# EAGLE board SparkFun RTK Facet - Cellular-Panel (EAGLE 9.6.2), part 1 of 3
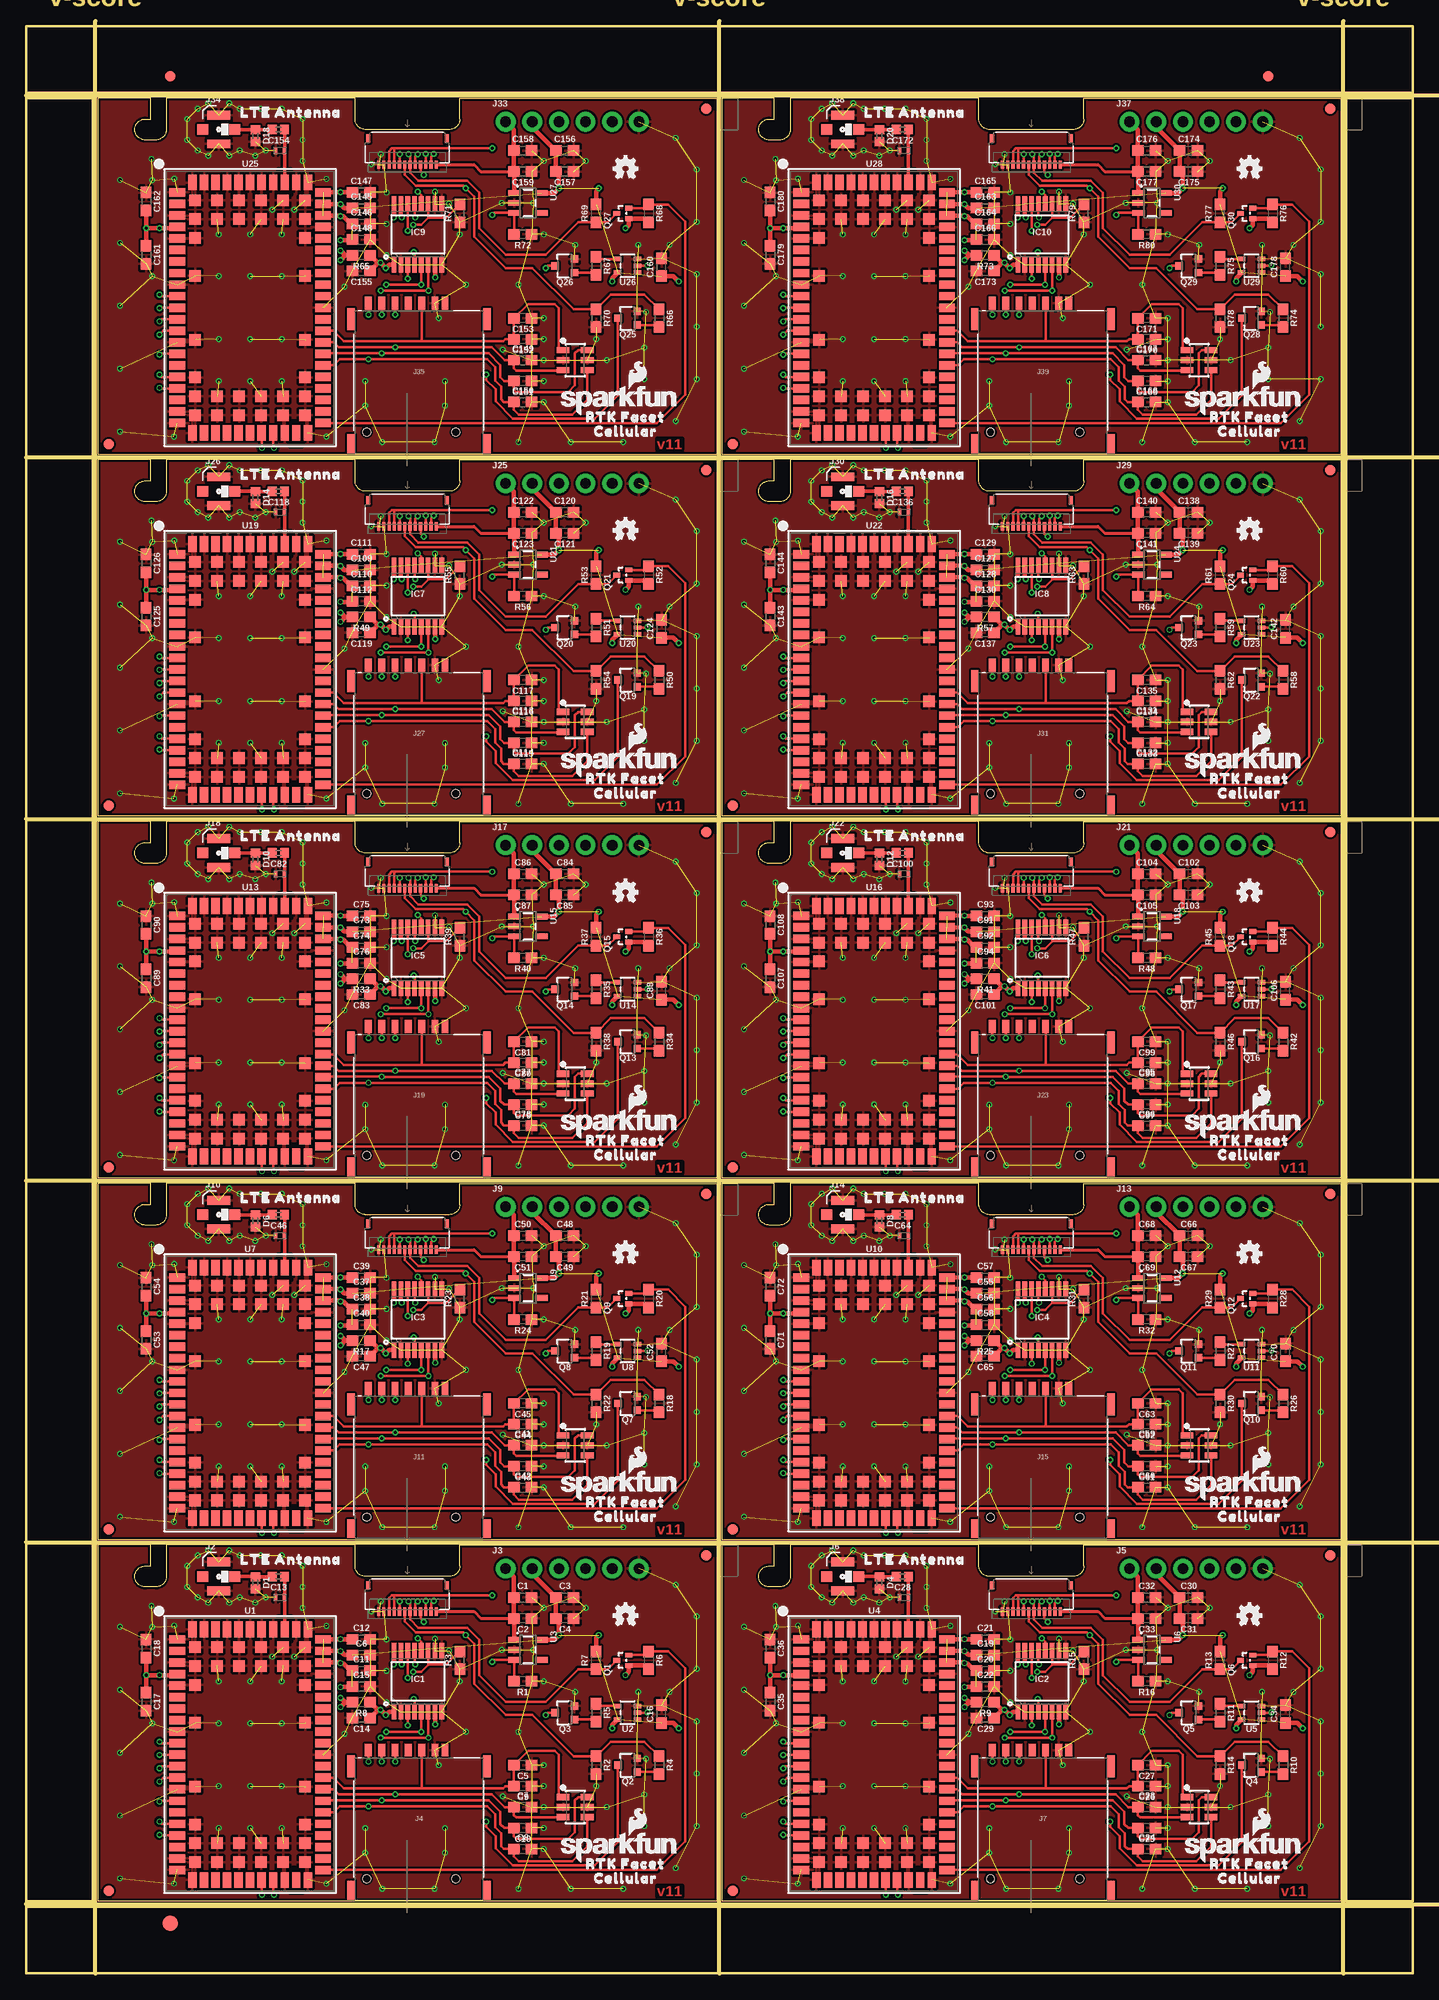
[diagram p0: board, top side]
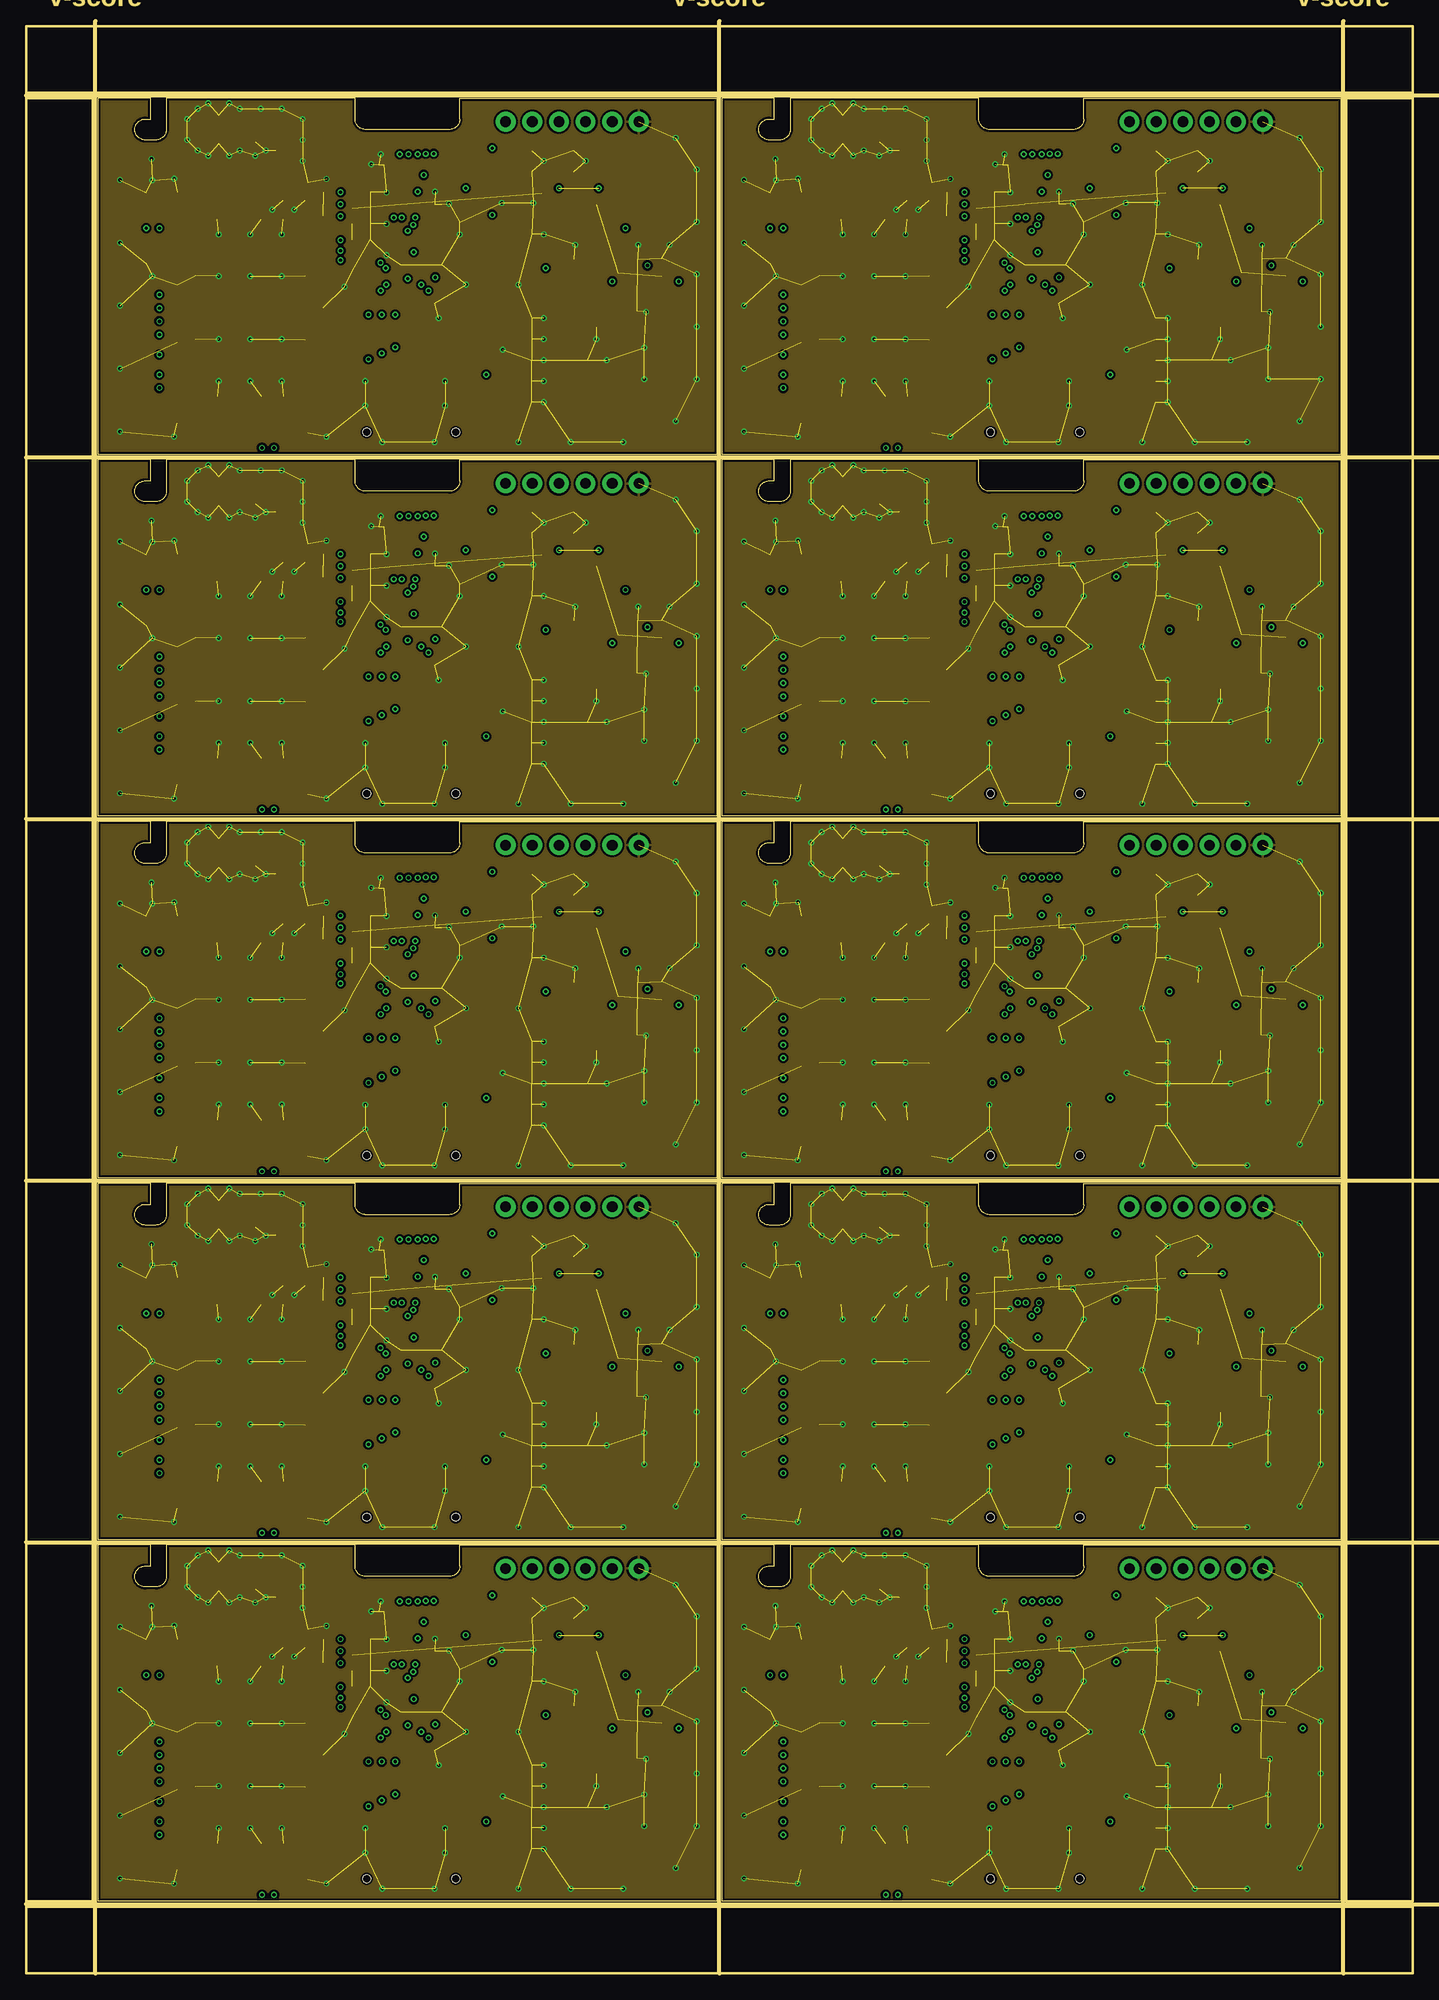
[diagram p1: board, inner layer Route2]
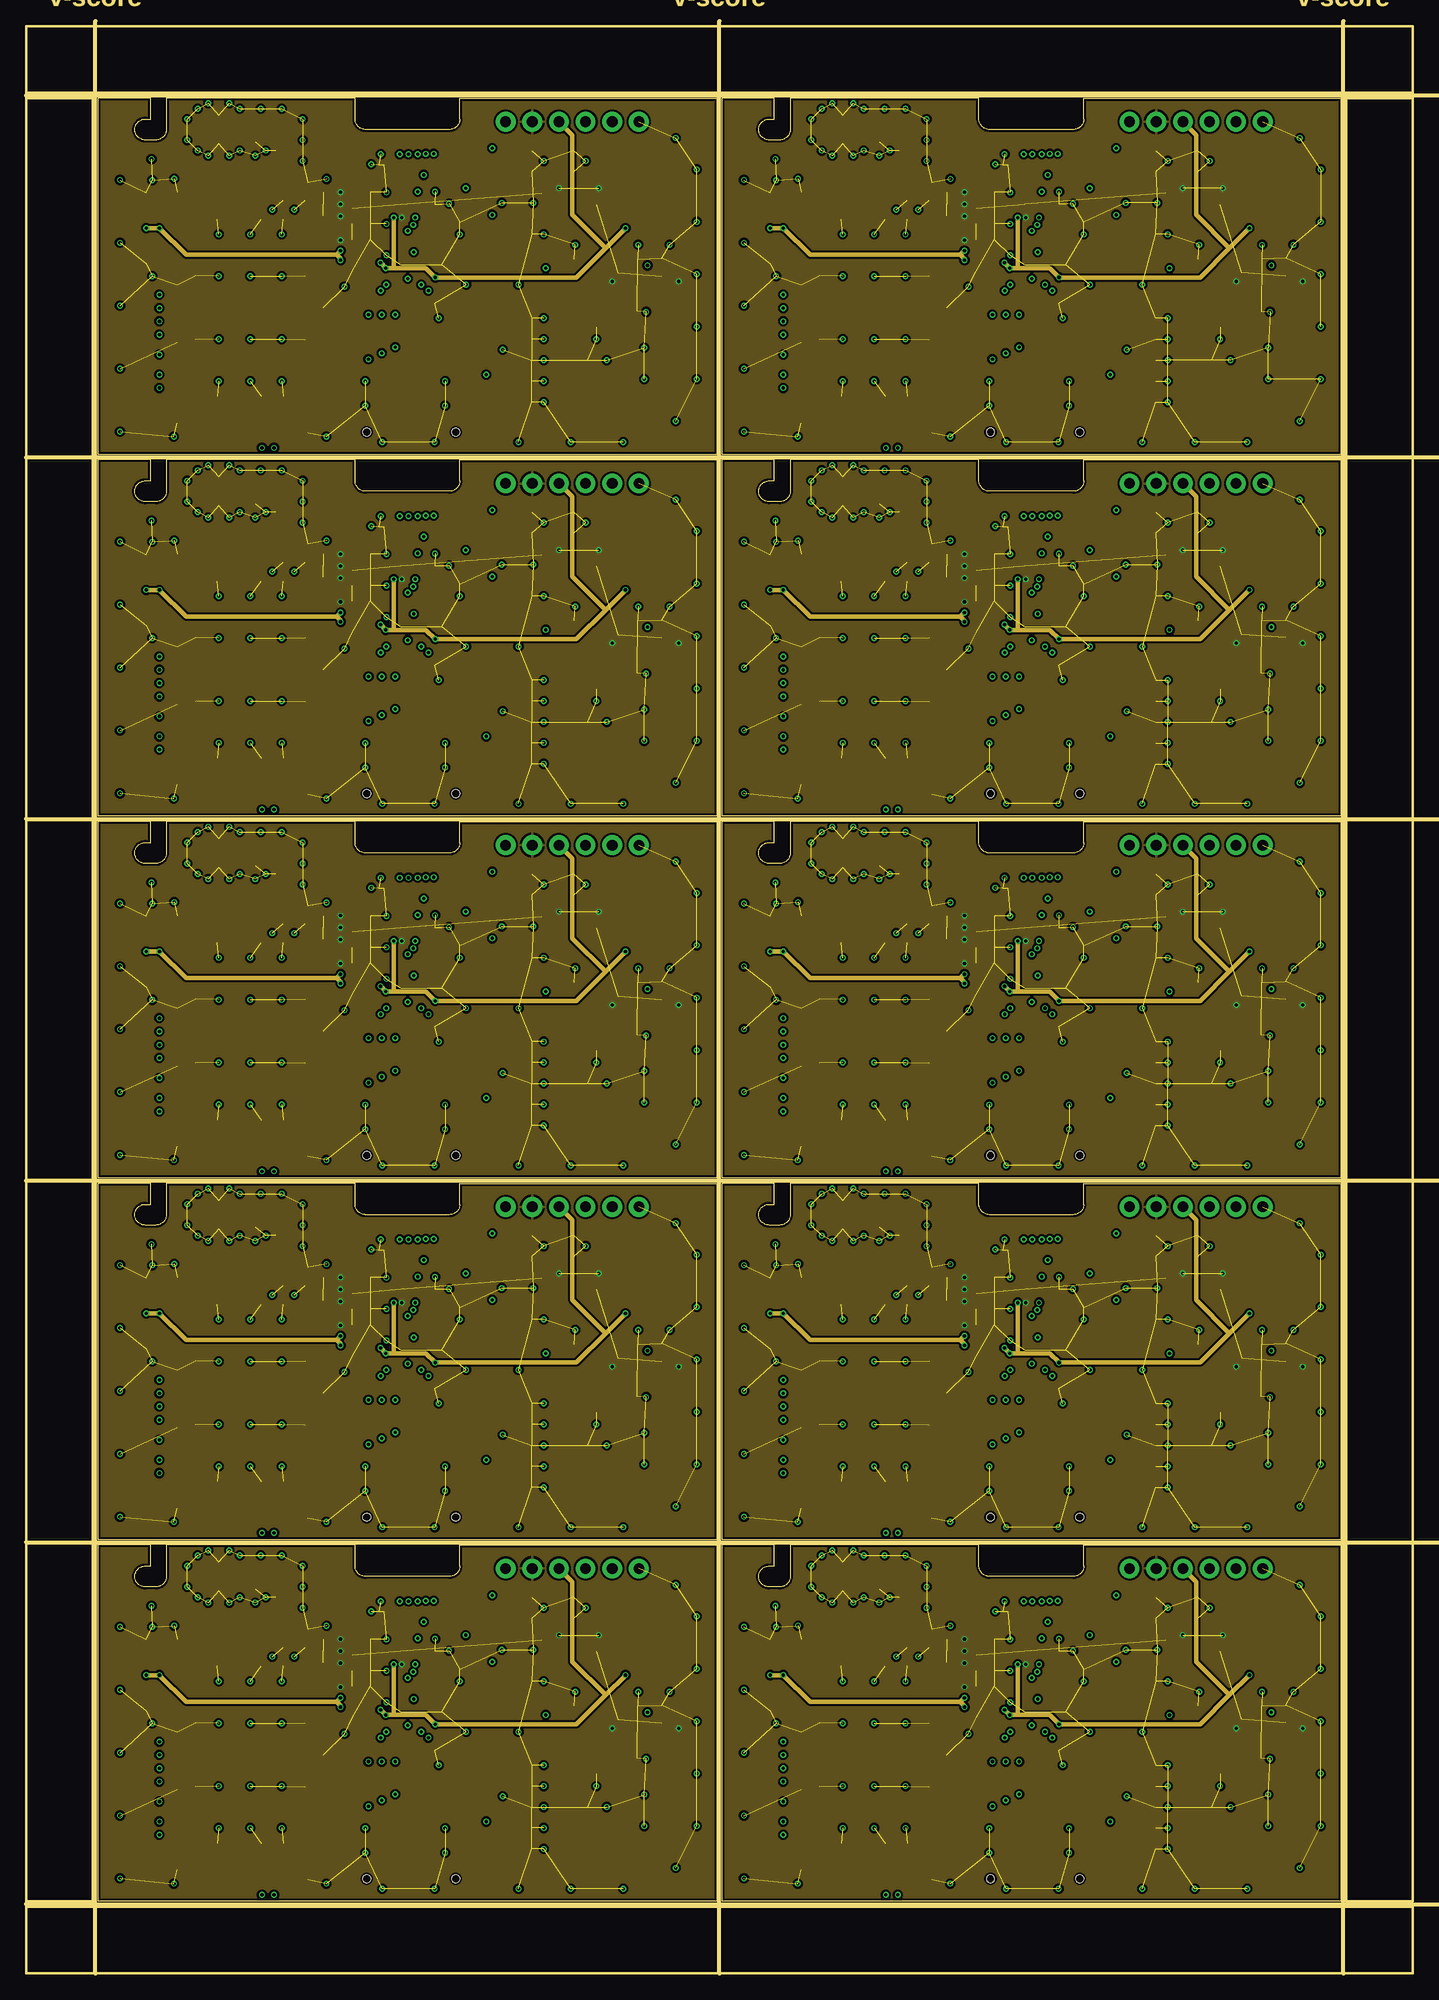
[diagram p2: board, inner layer Route15]
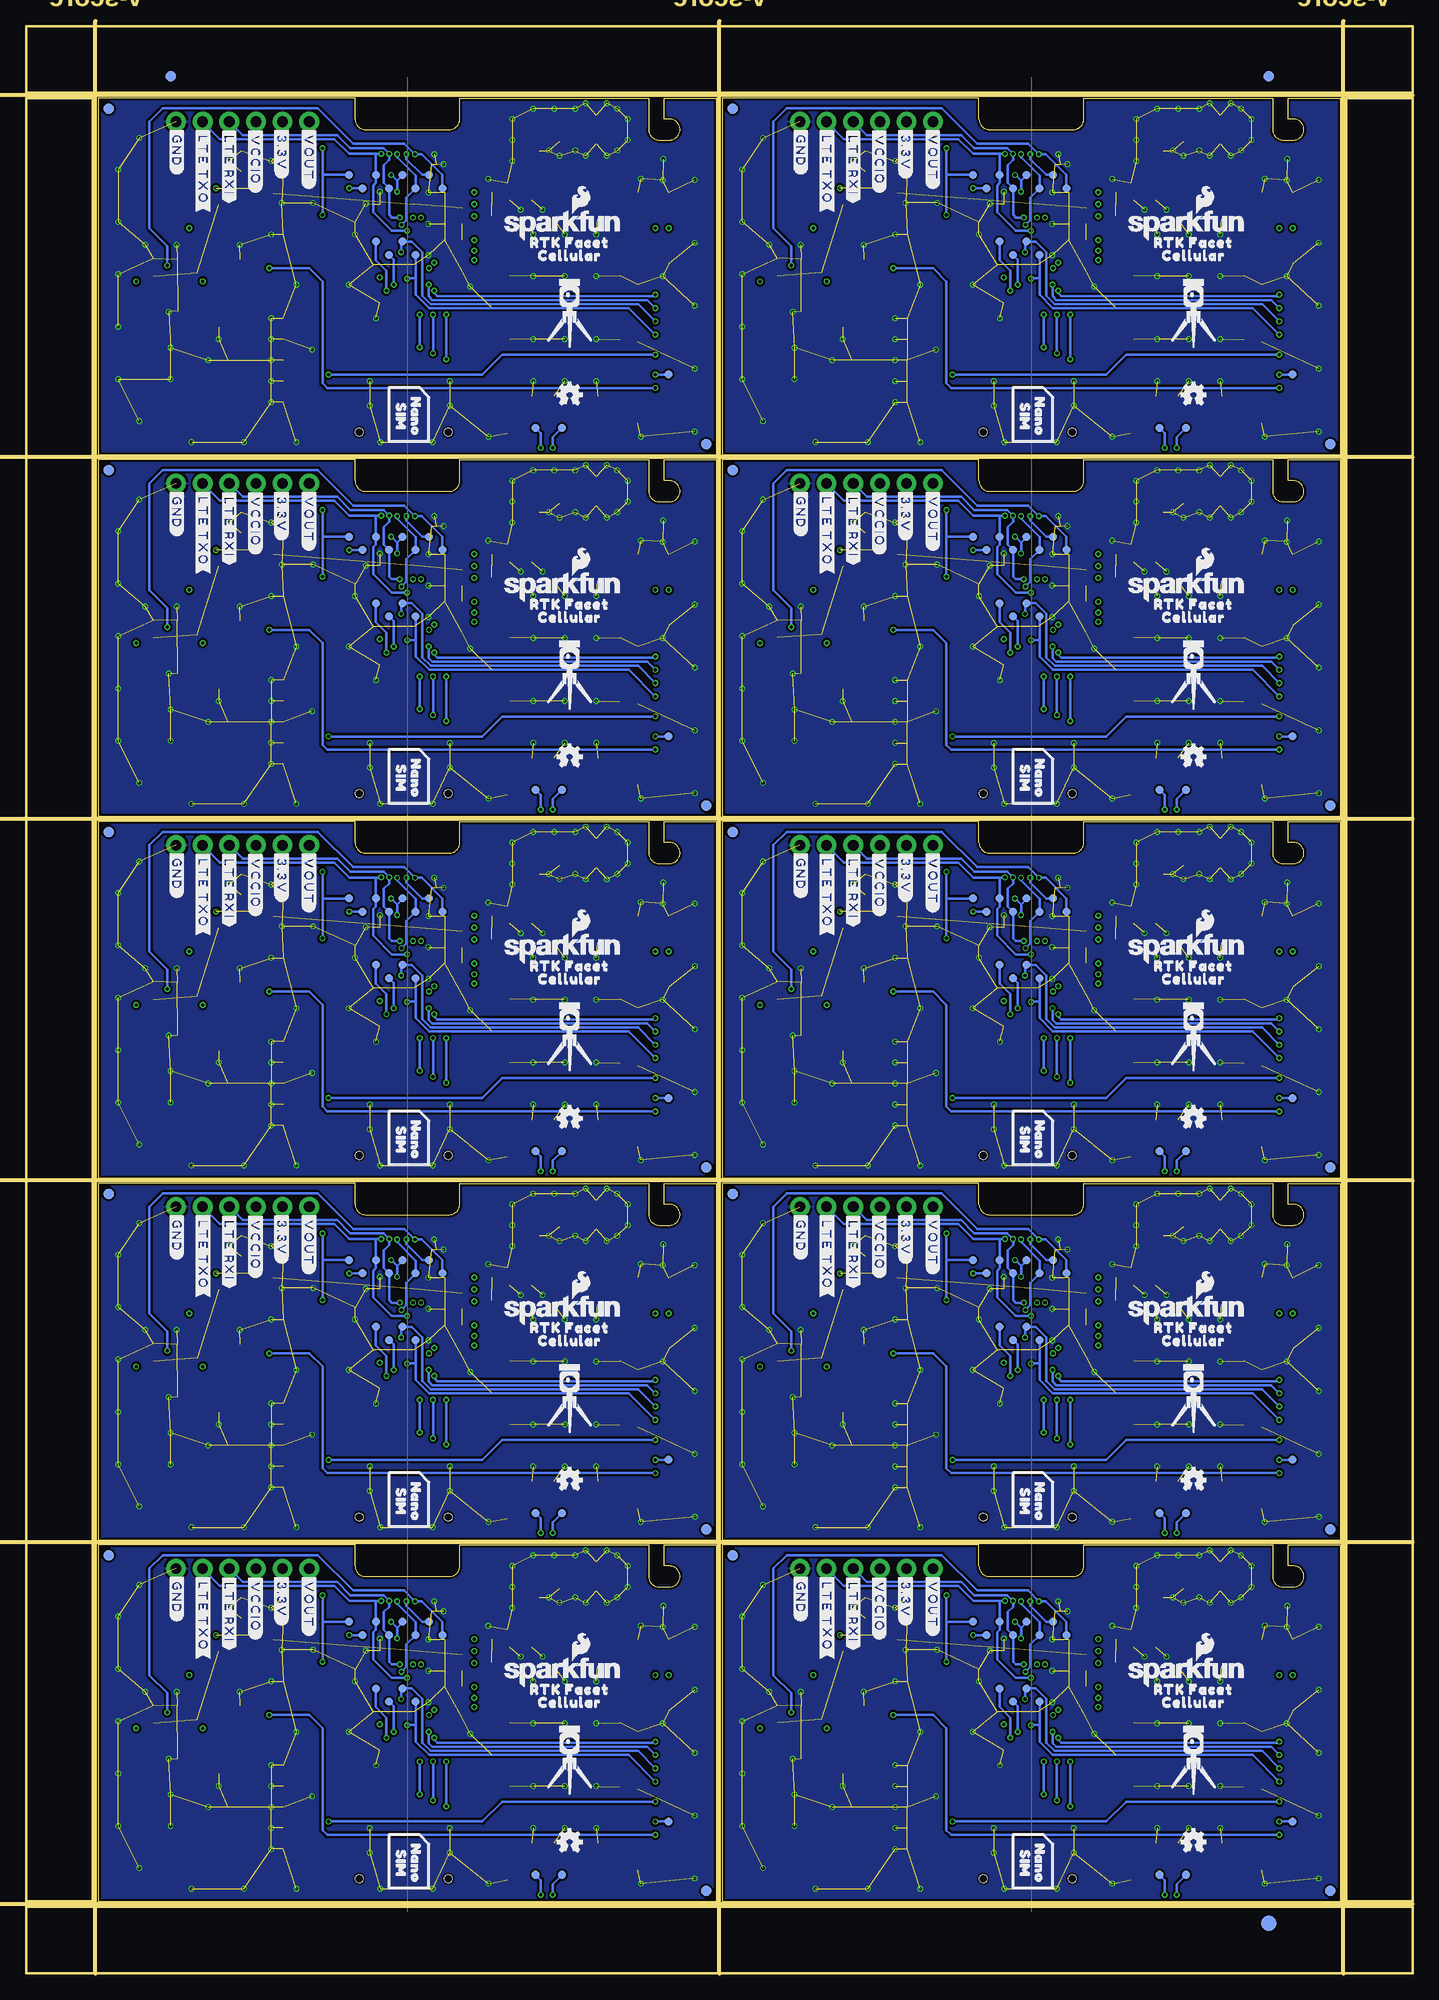
[diagram p3: board, bottom side, seen from below]

Size 132.22 x 185.75 mm. Coordinates in mm from the lower left corner, seen from the top.
Outline: 196 segments
Copper layers (1*2*15*16): Top 0.035559375mm / dielectric 0.47751875mm / Route2 0.035559375mm / dielectric 0.47751875mm / Route15 0.035559375mm / dielectric 0.47751875mm / Bottom 0.035559375mm
Design rules "SparkFun RTK Facet - Cellular": minimum track width 5mil, minimum drill 0.2mm, track to track 5mil, track to pad 5mil, pad to pad 5mil, via to via 5mil, smd to smd 5mil, copper to edge 7mil, drill to drill 7mil, minimum pad ring 5mil, minimum via ring 5mil, stop-mask expansion 2.5mil, vias tented up to drill 25mil, thermal gap 10mil
Net classes: 0 default: width 0 mm, drill 0 mm; 1 power: width 0.178 mm
tKeepout: area 62.9,6.9 to 65.9,40.9; area 6.9,6.9 to 9.9,40.9; area 122.4,6.9 to 125.4,40.9; area 66.4,6.9 to 69.4,40.9; area 62.9,41.4 to 65.9,75.4; area 6.9,41.4 to 9.9,75.4; area 122.4,41.4 to 125.4,75.4; area 66.4,41.4 to 69.4,75.4; area 62.9,75.9 to 65.9,109.9; area 6.9,75.9 to 9.9,109.9; area 122.4,75.9 to 125.4,109.9; area 66.4,75.9 to 69.4,109.9; 8 more areas
bKeepout: area 62.9,6.9 to 65.9,40.9; area 6.9,6.9 to 9.9,40.9; area 122.4,6.9 to 125.4,40.9; area 66.4,6.9 to 69.4,40.9; area 62.9,41.4 to 65.9,75.4; area 6.9,41.4 to 9.9,75.4; area 122.4,41.4 to 125.4,75.4; area 66.4,41.4 to 69.4,75.4; area 62.9,75.9 to 65.9,109.9; area 6.9,75.9 to 9.9,109.9; area 122.4,75.9 to 125.4,109.9; area 66.4,75.9 to 69.4,109.9; 8 more areas
tRestrict: area 17.5,37.1 to 19.2,38.6; area 77,37.1 to 78.7,38.6; area 17.5,71.6 to 19.2,73.1; area 77,71.6 to 78.7,73.1; area 17.5,106.1 to 19.2,107.6; area 77,106.1 to 78.7,107.6; area 17.5,140.6 to 19.2,142.1; area 77,140.6 to 78.7,142.1; area 17.5,175.1 to 19.2,176.6; area 77,175.1 to 78.7,176.6; 20 lines
Milling: 9 lines

## Footprints (pad centres in the part's own frame; a part is rotated, then mirrored left to right if it is on the bottom)
0603 = smd 1.1 x 1: 1 -0.85,0; 2 0.85,0
0402 = smd 0.85 x 0.9: 1 -0.58,0; 2 0.58,0
SOT23-6L = smd 0.6 x 1.2: 1 -0.95,-1.15; 2 0,-1.15; 3 0.95,-1.15; 4 0.95,1.15; 5 0,1.15; 6 -0.95,1.15
FIDUCIAL-1X2 = smd 1 x 1: 1 0,0
FIDUCIAL-1.5X3 = smd 1.5 x 1.5: 1 0,0
SOP65P640X120-16N = smd 1.5 x 0.45: 1 -2.9,2.275; 2 -2.9,1.625; 3 -2.9,0.975; 4 -2.9,0.325; 5 -2.9,-0.325; 6 -2.9,-0.975; 7 -2.9,-1.625; 8 -2.9,-2.275; 9 2.9,-2.275; 10 2.9,-1.625; 11 2.9,-0.975; 12 2.9,-0.325; 13 2.9,0.325; 14 2.9,0.975; 15 2.9,1.625; 16 2.9,2.275
FPC_12_DOUBLESIDED_BACKFLIP = smd 0.3 x 0.8: 1 -2.75,1.35; 2 -2.25,1.35; 3 -1.75,1.35; 4 -1.25,1.35; 5 -0.75,1.35; 6 -0.25,1.35; 7 0.25,1.35; 8 0.75,1.35; 9 1.25,1.35; 10 1.75,1.35; 11 2.25,1.35; 12 2.75,1.35 | smd 0.4 x 0.8: MP1 -3.75,-1.15; MP2 3.75,-1.15
U.FL = smd 2.2 x 0.85: 1 0,1.375; 2 0,-1.375 | smd 1.05 x 1: FEED 1.525,0; NC -1.525,0
1X06_NO_SILK = drill 1.016 pad 1.88: 1 0,0; 2 2.54,0; 3 5.08,0; 4 7.62,0; 5 10.16,0; 6 12.7,0
NANO_SIM_PP_REDUCED_PADS = smd 0.7 x 2.1: A1 6.495,6; A2 -6.495,6 | smd 0.7 x 1.8: A3 -6.495,-5.85; A4 6.495,-5.85 | smd 0.65 x 1.23: C1 0.255,7.535; C2 -2.285,7.535; C3 -4.825,7.535; C5 1.525,7.535; C6 -1.015,7.535; C7 -3.555,7.535; CD 2.475,7.535 | hole 0.75: 3.505,-4.75; -4.995,-4.75
0402_COILCRAFT = smd 0.356 x 0.66: P$1 -0.432,0; P$2 0.432,0
SOT-416FL = smd 0.46 x 0.65: 1 -0.5,-1.1; 2 0.5,-1.1; 3 0,0.05
SOT323 = smd 0.7 x 0.7: 1 -0.65,-0.925; 2 0.65,-0.925; 3 0,0.925
PAD.03X.03 = smd 0.762 x 0.762: 1 0,0
SARA-LGA = smd 0.8 x 1.5: 1 -11,-6.95; 2 -9.9,-6.95; 3 -8.8,-6.95; 4 -7.7,-6.95; 5 -6.6,-6.95; 6 -5.5,-6.95; 7 -4.4,-6.95; 8 -3.3,-6.95; 9 -2.2,-6.95; 10 -1.1,-6.95; 11 0,-6.95; 12 1.1,-6.95; 13 2.2,-6.95; 14 3.3,-6.95; 15 4.4,-6.95; 16 5.5,-6.95; 17 6.6,-6.95; 18 7.7,-6.95; 19 8.8,-6.95; 20 9.9,-6.95; 21 11,-6.95; 33 11,6.95; 34 9.9,6.95; 35 8.8,6.95; 36 7.7,6.95; 37 6.6,6.95; 38 5.5,6.95; 39 4.4,6.95; 40 3.3,6.95; 41 2.2,6.95; 42 1.1,6.95; 43 0,6.95; 44 -1.1,6.95; 45 -2.2,6.95; 46 -3.3,6.95; 47 -4.4,6.95; 48 -5.5,6.95; 49 -6.6,6.95; 50 -7.7,6.95; 51 -8.8,6.95; 52 -9.9,6.95; 53 -11,6.95 | smd 1.5 x 0.8: 22 11.95,-5.5; 23 11.95,-4.4; 24 11.95,-3.3; 25 11.95,-2.2; 26 11.95,-1.1; 27 11.95,0; 28 11.95,1.1; 29 11.95,2.2; 30 11.95,3.3; 31 11.95,4.4; 32 11.95,5.5; 54 -11.95,5.5; 55 -11.95,4.4; 56 -11.95,3.3; 57 -11.95,2.2; 58 -11.95,1.1; 59 -11.95,0; 60 -11.95,-1.1; 61 -11.95,-2.2; 62 -11.95,-3.3; 63 -11.95,-4.4; 64 -11.95,-5.5 | smd 1.1 x 1.1: 65 -10.25,-5.25; 66 -10.25,-3.15; 67 -10.25,-1.05; 68 -10.25,1.05; 69 -10.25,3.15; 70 -10.25,5.25; 71 -8.45,-5.25; 72 -8.45,-3.15; 73 -8.45,-1.05; 74 -8.45,1.05; 75 -8.45,3.15; 76 -8.45,5.25; 77 -6.65,-5.25; 78 -6.65,5.25; 79 -3.05,-5.25; 80 -3.05,5.25; 81 3.05,-5.25; 82 3.05,5.25; 83 6.65,-5.25; 84 6.65,5.25; 85 8.45,-5.25; 86 8.45,-3.15; 87 8.45,-1.05; 88 8.45,1.05; 89 8.45,3.15; 90 8.45,5.25; 91 10.25,-5.25; 92 10.25,-3.15; 93 10.25,-1.05; 94 10.25,1.05; 95 10.25,3.15; 96 10.25,5.25
SOT353 = smd 0.42 x 0.7: 1 -0.65,-0.95; 2 0,-0.95; 3 0.65,-0.95; 4 0.65,0.95; 5 -0.65,0.95
SOT23-5 = smd 0.55 x 1.2: 1 -0.95,-1.3; 2 0,-1.3; 3 0.95,-1.3; 4 0.95,1.3; 5 -0.95,1.3

## Placement (x,y rotation side)
C1  1.0uF  [0603]  47.36,35.86 0 top
C2  0.1uF  [0603]  47.36,33.86 180 top
C3  1.0uF  [0603]  51.36,35.86 0 top
C4  0.1uF  [0603]  51.36,33.86 180 top
C5  0.1uF  [0603]  47.36,19.86 180 top
C6  0.1uF  [0603]  31.96,30.36 0 top
C7  47pF  [0603]  47.36,15.86 0 top
C8  47pF  [0603]  47.36,11.86 0 top
C9  47pF  [0603]  47.36,17.86 180 top
C10  47pF  [0603]  47.36,13.86 180 top
C11  68pF  [0603]  31.96,28.86 0 top
C12  10uF  [0603]  31.96,31.86 0 top
C13  33pF  [0402]  24.06,37.86 180 top
C14  0.1uF  [0603]  31.96,24.36 180 top
C15  15pF  [0603]  31.96,27.36 0 top
C16  0.1uF  [0603]  60.6,24.73 90 top
C17  1.0uF  [0603]  11.44,25.91 270 top
C18  0.1uF  [0603]  11.44,30.99 270 top
C19  0.1uF  [0603]  91.47,30.36 0 top
C20  68pF  [0603]  91.47,28.86 0 top
C21  10uF  [0603]  91.47,31.86 0 top
C22  15pF  [0603]  91.47,27.36 0 top
C23  47pF  [0603]  106.87,15.86 0 top
C24  47pF  [0603]  106.87,11.86 0 top
C25  47pF  [0603]  106.87,13.86 180 top
C26  47pF  [0603]  106.87,17.86 180 top
C27  0.1uF  [0603]  106.87,19.86 180 top
C28  33pF  [0402]  83.57,37.86 180 top
C29  0.1uF  [0603]  91.47,24.36 180 top
C30  1.0uF  [0603]  110.87,35.86 0 top
C31  0.1uF  [0603]  110.87,33.86 180 top
C32  1.0uF  [0603]  106.87,35.86 0 top
C33  0.1uF  [0603]  106.87,33.86 180 top
C34  0.1uF  [0603]  120.11,24.73 90 top
C35  1.0uF  [0603]  70.95,25.91 270 top
C36  0.1uF  [0603]  70.95,30.99 270 top
C37  0.1uF  [0603]  31.96,64.87 0 top
C38  68pF  [0603]  31.96,63.37 0 top
C39  10uF  [0603]  31.96,66.37 0 top
C40  15pF  [0603]  31.96,61.87 0 top
C41  47pF  [0603]  47.36,50.37 0 top
C42  47pF  [0603]  47.36,46.37 0 top
C43  47pF  [0603]  47.36,48.37 180 top
C44  47pF  [0603]  47.36,52.37 180 top
C45  0.1uF  [0603]  47.36,54.37 180 top
C46  33pF  [0402]  24.06,72.37 180 top
C47  0.1uF  [0603]  31.96,58.87 180 top
C48  1.0uF  [0603]  51.36,70.37 0 top
C49  0.1uF  [0603]  51.36,68.37 180 top
C50  1.0uF  [0603]  47.36,70.37 0 top
C51  0.1uF  [0603]  47.36,68.37 180 top
C52  0.1uF  [0603]  60.6,59.24 90 top
C53  1.0uF  [0603]  11.44,60.42 270 top
C54  0.1uF  [0603]  11.44,65.5 270 top
C55  0.1uF  [0603]  91.47,64.87 0 top
C56  68pF  [0603]  91.47,63.37 0 top
C57  10uF  [0603]  91.47,66.37 0 top
C58  15pF  [0603]  91.47,61.87 0 top
C59  47pF  [0603]  106.87,50.37 0 top
C60  47pF  [0603]  106.87,46.37 0 top
C61  47pF  [0603]  106.87,48.37 180 top
C62  47pF  [0603]  106.87,52.37 180 top
C63  0.1uF  [0603]  106.87,54.37 180 top
C64  33pF  [0402]  83.57,72.37 180 top
C65  0.1uF  [0603]  91.47,58.87 180 top
C66  1.0uF  [0603]  110.87,70.37 0 top
C67  0.1uF  [0603]  110.87,68.37 180 top
C68  1.0uF  [0603]  106.87,70.37 0 top
C69  0.1uF  [0603]  106.87,68.37 180 top
C70  0.1uF  [0603]  120.11,59.24 90 top
C71  1.0uF  [0603]  70.95,60.42 270 top
C72  0.1uF  [0603]  70.95,65.5 270 top
C73  0.1uF  [0603]  31.96,99.37 0 top
C74  68pF  [0603]  31.96,97.87 0 top
C75  10uF  [0603]  31.96,100.87 0 top
C76  15pF  [0603]  31.96,96.37 0 top
C77  47pF  [0603]  47.36,84.87 0 top
C78  47pF  [0603]  47.36,80.87 0 top
C79  47pF  [0603]  47.36,82.87 180 top
C80  47pF  [0603]  47.36,86.87 180 top
C81  0.1uF  [0603]  47.36,88.87 180 top
C82  33pF  [0402]  24.06,106.87 180 top
C83  0.1uF  [0603]  31.96,93.37 180 top
C84  1.0uF  [0603]  51.36,104.87 0 top
C85  0.1uF  [0603]  51.36,102.87 180 top
C86  1.0uF  [0603]  47.36,104.87 0 top
C87  0.1uF  [0603]  47.36,102.87 180 top
C88  0.1uF  [0603]  60.6,93.74 90 top
C89  1.0uF  [0603]  11.44,94.92 270 top
C90  0.1uF  [0603]  11.44,100 270 top
C91  0.1uF  [0603]  91.47,99.37 0 top
C92  68pF  [0603]  91.47,97.87 0 top
C93  10uF  [0603]  91.47,100.87 0 top
C94  15pF  [0603]  91.47,96.37 0 top
C95  47pF  [0603]  106.87,84.87 0 top
C96  47pF  [0603]  106.87,80.87 0 top
C97  47pF  [0603]  106.87,82.87 180 top
C98  47pF  [0603]  106.87,86.87 180 top
C99  0.1uF  [0603]  106.87,88.87 180 top
C100  33pF  [0402]  83.57,106.87 180 top
C101  0.1uF  [0603]  91.47,93.37 180 top
C102  1.0uF  [0603]  110.87,104.87 0 top
C103  0.1uF  [0603]  110.87,102.87 180 top
C104  1.0uF  [0603]  106.87,104.87 0 top
C105  0.1uF  [0603]  106.87,102.87 180 top
C106  0.1uF  [0603]  120.11,93.74 90 top
C107  1.0uF  [0603]  70.95,94.92 270 top
C108  0.1uF  [0603]  70.95,100 270 top
C109  0.1uF  [0603]  31.96,133.88 0 top
C110  68pF  [0603]  31.96,132.38 0 top
C111  10uF  [0603]  31.96,135.38 0 top
C112  15pF  [0603]  31.96,130.88 0 top
C113  47pF  [0603]  47.36,119.38 0 top
C114  47pF  [0603]  47.36,115.38 0 top
C115  47pF  [0603]  47.36,117.38 180 top
C116  47pF  [0603]  47.36,121.38 180 top
C117  0.1uF  [0603]  47.36,123.38 180 top
C118  33pF  [0402]  24.06,141.38 180 top
C119  0.1uF  [0603]  31.96,127.88 180 top
C120  1.0uF  [0603]  51.36,139.38 0 top
C121  0.1uF  [0603]  51.36,137.38 180 top
C122  1.0uF  [0603]  47.36,139.38 0 top
C123  0.1uF  [0603]  47.36,137.38 180 top
C124  0.1uF  [0603]  60.6,128.25 90 top
C125  1.0uF  [0603]  11.44,129.43 270 top
C126  0.1uF  [0603]  11.44,134.51 270 top
C127  0.1uF  [0603]  91.47,133.88 0 top
C128  68pF  [0603]  91.47,132.38 0 top
C129  10uF  [0603]  91.47,135.38 0 top
C130  15pF  [0603]  91.47,130.88 0 top
C131  47pF  [0603]  106.87,119.38 0 top
C132  47pF  [0603]  106.87,115.38 0 top
C133  47pF  [0603]  106.87,117.38 180 top
C134  47pF  [0603]  106.87,121.38 180 top
C135  0.1uF  [0603]  106.87,123.38 180 top
C136  33pF  [0402]  83.57,141.38 180 top
C137  0.1uF  [0603]  91.47,127.88 180 top
C138  1.0uF  [0603]  110.87,139.38 0 top
C139  0.1uF  [0603]  110.87,137.38 180 top
C140  1.0uF  [0603]  106.87,139.38 0 top
C141  0.1uF  [0603]  106.87,137.38 180 top
C142  0.1uF  [0603]  120.11,128.25 90 top
C143  1.0uF  [0603]  70.95,129.43 270 top
C144  0.1uF  [0603]  70.95,134.51 270 top
C145  0.1uF  [0603]  31.96,168.39 0 top
C146  68pF  [0603]  31.96,166.89 0 top
C147  10uF  [0603]  31.96,169.89 0 top
C148  15pF  [0603]  31.96,165.39 0 top
C149  47pF  [0603]  47.36,153.89 0 top
C150  47pF  [0603]  47.36,149.89 0 top
C151  47pF  [0603]  47.36,151.89 180 top
C152  47pF  [0603]  47.36,155.89 180 top
C153  0.1uF  [0603]  47.36,157.89 180 top
C154  33pF  [0402]  24.06,175.89 180 top
C155  0.1uF  [0603]  31.96,162.39 180 top
C156  1.0uF  [0603]  51.36,173.89 0 top
C157  0.1uF  [0603]  51.36,171.89 180 top
C158  1.0uF  [0603]  47.36,173.89 0 top
C159  0.1uF  [0603]  47.36,171.89 180 top
C160  0.1uF  [0603]  60.6,162.76 90 top
C161  1.0uF  [0603]  11.44,163.94 270 top
C162  0.1uF  [0603]  11.44,169.02 270 top
C163  0.1uF  [0603]  91.47,168.39 0 top
C164  68pF  [0603]  91.47,166.89 0 top
C165  10uF  [0603]  91.47,169.89 0 top
C166  15pF  [0603]  91.47,165.39 0 top
C167  47pF  [0603]  106.87,153.89 0 top
C168  47pF  [0603]  106.87,149.89 0 top
C169  47pF  [0603]  106.87,151.89 180 top
C170  47pF  [0603]  106.87,155.89 180 top
C171  0.1uF  [0603]  106.87,157.89 180 top
C172  33pF  [0402]  83.57,175.89 180 top
C173  0.1uF  [0603]  91.47,162.39 180 top
C174  1.0uF  [0603]  110.87,173.89 0 top
C175  0.1uF  [0603]  110.87,171.89 180 top
C176  1.0uF  [0603]  106.87,173.89 0 top
C177  0.1uF  [0603]  106.87,171.89 180 top
C178  0.1uF  [0603]  120.11,162.76 90 top
C179  1.0uF  [0603]  70.95,163.94 270 top
C180  0.1uF  [0603]  70.95,169.02 270 top
D1  PESD0402  [0402]  21.86,37.26 270 top
D2  DT1042-04SO-7  [SOT23-6L]  52.36,15.86 270 top
D3  DT1042-04SO-7  [SOT23-6L]  111.87,15.86 270 top
D4  PESD0402  [0402]  81.37,37.26 270 top
D5  DT1042-04SO-7  [SOT23-6L]  52.36,50.37 270 top
D6  PESD0402  [0402]  21.86,71.77 270 top
D7  DT1042-04SO-7  [SOT23-6L]  111.87,50.37 270 top
D8  PESD0402  [0402]  81.37,71.77 270 top
D9  DT1042-04SO-7  [SOT23-6L]  52.36,84.87 270 top
D10  PESD0402  [0402]  21.86,106.27 270 top
D11  DT1042-04SO-7  [SOT23-6L]  111.87,84.87 270 top
D12  PESD0402  [0402]  81.37,106.27 270 top
D13  DT1042-04SO-7  [SOT23-6L]  52.36,119.38 270 top
D14  PESD0402  [0402]  21.86,140.78 270 top
D15  DT1042-04SO-7  [SOT23-6L]  111.87,119.38 270 top
D16  PESD0402  [0402]  81.37,140.78 270 top
D17  DT1042-04SO-7  [SOT23-6L]  52.36,153.89 270 top
D18  PESD0402  [0402]  21.86,175.29 270 top
D19  DT1042-04SO-7  [SOT23-6L]  111.87,153.89 270 top
D20  PESD0402  [0402]  81.37,175.29 270 top
E$1  [FIDUCIAL-1X2]  13.72,180.99 0 top
E$2  [FIDUCIAL-1X2]  13.72,180.99 0 bottom
E$3  [FIDUCIAL-1X2]  118.45,180.99 0 top
E$4  [FIDUCIAL-1X2]  118.45,180.99 0 bottom
E$5  [FIDUCIAL-1.5X3]  13.72,4.76 0 top
E$6  [FIDUCIAL-1.5X3]  13.72,4.76 0 bottom
FID1  FIDUCIAL1X2  [FIDUCIAL-1X2]  7.86,7.86 0 bottom
FID2  FIDUCIAL1X2  [FIDUCIAL-1X2]  64.86,39.86 0 bottom
FID3  FIDUCIAL1X2  [FIDUCIAL-1X2]  64.86,39.86 0 top
FID4  FIDUCIAL1X2  [FIDUCIAL-1X2]  7.86,7.86 0 top
FID5  FIDUCIAL1X2  [FIDUCIAL-1X2]  67.37,7.86 0 bottom
FID6  FIDUCIAL1X2  [FIDUCIAL-1X2]  124.37,39.86 0 bottom
FID7  FIDUCIAL1X2  [FIDUCIAL-1X2]  124.37,39.86 0 top
FID8  FIDUCIAL1X2  [FIDUCIAL-1X2]  67.37,7.86 0 top
FID9  FIDUCIAL1X2  [FIDUCIAL-1X2]  7.86,42.37 0 bottom
FID10  FIDUCIAL1X2  [FIDUCIAL-1X2]  64.86,74.37 0 bottom
FID11  FIDUCIAL1X2  [FIDUCIAL-1X2]  64.86,74.37 0 top
FID12  FIDUCIAL1X2  [FIDUCIAL-1X2]  7.86,42.37 0 top
FID13  FIDUCIAL1X2  [FIDUCIAL-1X2]  67.37,42.37 0 bottom
FID14  FIDUCIAL1X2  [FIDUCIAL-1X2]  124.37,74.37 0 bottom
FID15  FIDUCIAL1X2  [FIDUCIAL-1X2]  124.37,74.37 0 top
FID16  FIDUCIAL1X2  [FIDUCIAL-1X2]  67.37,42.37 0 top
FID17  FIDUCIAL1X2  [FIDUCIAL-1X2]  7.86,76.87 0 bottom
FID18  FIDUCIAL1X2  [FIDUCIAL-1X2]  64.86,108.87 0 bottom
FID19  FIDUCIAL1X2  [FIDUCIAL-1X2]  64.86,108.87 0 top
FID20  FIDUCIAL1X2  [FIDUCIAL-1X2]  7.86,76.87 0 top
FID21  FIDUCIAL1X2  [FIDUCIAL-1X2]  67.37,76.87 0 bottom
FID22  FIDUCIAL1X2  [FIDUCIAL-1X2]  124.37,108.87 0 bottom
FID23  FIDUCIAL1X2  [FIDUCIAL-1X2]  124.37,108.87 0 top
FID24  FIDUCIAL1X2  [FIDUCIAL-1X2]  67.37,76.87 0 top
FID25  FIDUCIAL1X2  [FIDUCIAL-1X2]  7.86,111.38 0 bottom
FID26  FIDUCIAL1X2  [FIDUCIAL-1X2]  64.86,143.38 0 bottom
FID27  FIDUCIAL1X2  [FIDUCIAL-1X2]  64.86,143.38 0 top
FID28  FIDUCIAL1X2  [FIDUCIAL-1X2]  7.86,111.38 0 top
FID29  FIDUCIAL1X2  [FIDUCIAL-1X2]  67.37,111.38 0 bottom
FID30  FIDUCIAL1X2  [FIDUCIAL-1X2]  124.37,143.38 0 bottom
FID31  FIDUCIAL1X2  [FIDUCIAL-1X2]  124.37,143.38 0 top
FID32  FIDUCIAL1X2  [FIDUCIAL-1X2]  67.37,111.38 0 top
FID33  FIDUCIAL1X2  [FIDUCIAL-1X2]  7.86,145.89 0 bottom
FID34  FIDUCIAL1X2  [FIDUCIAL-1X2]  64.86,177.89 0 bottom
FID35  FIDUCIAL1X2  [FIDUCIAL-1X2]  64.86,177.89 0 top
FID36  FIDUCIAL1X2  [FIDUCIAL-1X2]  7.86,145.89 0 top
FID37  FIDUCIAL1X2  [FIDUCIAL-1X2]  67.37,145.89 0 bottom
FID38  FIDUCIAL1X2  [FIDUCIAL-1X2]  124.37,177.89 0 bottom
FID39  FIDUCIAL1X2  [FIDUCIAL-1X2]  124.37,177.89 0 top
FID40  FIDUCIAL1X2  [FIDUCIAL-1X2]  67.37,145.89 0 top
IC1  SN74AVC4T774PW  [SOP65P640X120-16N]  37.36,27.86 90 top
IC2  SN74AVC4T774PW  [SOP65P640X120-16N]  96.87,27.86 90 top
IC3  SN74AVC4T774PW  [SOP65P640X120-16N]  37.36,62.37 90 top
IC4  SN74AVC4T774PW  [SOP65P640X120-16N]  96.87,62.37 90 top
IC5  SN74AVC4T774PW  [SOP65P640X120-16N]  37.36,96.87 90 top
IC6  SN74AVC4T774PW  [SOP65P640X120-16N]  96.87,96.87 90 top
IC7  SN74AVC4T774PW  [SOP65P640X120-16N]  37.36,131.38 90 top
IC8  SN74AVC4T774PW  [SOP65P640X120-16N]  96.87,131.38 90 top
IC9  SN74AVC4T774PW  [SOP65P640X120-16N]  37.36,165.89 90 top
IC10  SN74AVC4T774PW  [SOP65P640X120-16N]  96.87,165.89 90 top
J1  [FPC_12_DOUBLESIDED_BACKFLIP]  36.36,35.86 180 top
J2  U.FL  [U.FL]  18.36,37.86 0 top
J3  DIAG  [1X06_NO_SILK]  45.73,38.61 0 top
J4  [NANO_SIM_PP_REDUCED_PADS]  37.46,13.76 0 top
J5  DIAG  [1X06_NO_SILK]  105.24,38.61 0 top
J6  U.FL  [U.FL]  77.87,37.86 0 top
J7  [NANO_SIM_PP_REDUCED_PADS]  96.97,13.76 0 top
J8  [FPC_12_DOUBLESIDED_BACKFLIP]  95.87,35.86 180 top
J9  DIAG  [1X06_NO_SILK]  45.73,73.12 0 top
J10  U.FL  [U.FL]  18.36,72.37 0 top
J11  [NANO_SIM_PP_REDUCED_PADS]  37.46,48.27 0 top
J12  [FPC_12_DOUBLESIDED_BACKFLIP]  36.36,70.37 180 top
J13  DIAG  [1X06_NO_SILK]  105.24,73.12 0 top
J14  U.FL  [U.FL]  77.87,72.37 0 top
J15  [NANO_SIM_PP_REDUCED_PADS]  96.97,48.27 0 top
J16  [FPC_12_DOUBLESIDED_BACKFLIP]  95.87,70.37 180 top
J17  DIAG  [1X06_NO_SILK]  45.73,107.62 0 top
J18  U.FL  [U.FL]  18.36,106.87 0 top
J19  [NANO_SIM_PP_REDUCED_PADS]  37.46,82.77 0 top
J20  [FPC_12_DOUBLESIDED_BACKFLIP]  36.36,104.87 180 top
J21  DIAG  [1X06_NO_SILK]  105.24,107.62 0 top
J22  U.FL  [U.FL]  77.87,106.87 0 top
J23  [NANO_SIM_PP_REDUCED_PADS]  96.97,82.77 0 top
J24  [FPC_12_DOUBLESIDED_BACKFLIP]  95.87,104.87 180 top
J25  DIAG  [1X06_NO_SILK]  45.73,142.13 0 top
J26  U.FL  [U.FL]  18.36,141.38 0 top
J27  [NANO_SIM_PP_REDUCED_PADS]  37.46,117.28 0 top
J28  [FPC_12_DOUBLESIDED_BACKFLIP]  36.36,139.38 180 top
J29  DIAG  [1X06_NO_SILK]  105.24,142.13 0 top
J30  U.FL  [U.FL]  77.87,141.38 0 top
J31  [NANO_SIM_PP_REDUCED_PADS]  96.97,117.28 0 top
J32  [FPC_12_DOUBLESIDED_BACKFLIP]  95.87,139.38 180 top
J33  DIAG  [1X06_NO_SILK]  45.73,176.64 0 top
J34  U.FL  [U.FL]  18.36,175.89 0 top
J35  [NANO_SIM_PP_REDUCED_PADS]  37.46,151.79 0 top
J36  [FPC_12_DOUBLESIDED_BACKFLIP]  36.36,173.89 180 top
J37  DIAG  [1X06_NO_SILK]  105.24,176.64 0 top
J38  U.FL  [U.FL]  77.87,175.89 0 top
J39  [NANO_SIM_PP_REDUCED_PADS]  96.97,151.79 0 top
J40  [FPC_12_DOUBLESIDED_BACKFLIP]  95.87,173.89 180 top
L1  DNP  [0402_COILCRAFT]  24.21,35.86 180 top
L2  DNP  [0402_COILCRAFT]  83.72,35.86 180 top
L3  DNP  [0402_COILCRAFT]  24.21,70.37 180 top
L4  DNP  [0402_COILCRAFT]  83.72,70.37 180 top
L5  DNP  [0402_COILCRAFT]  24.21,104.87 180 top
L6  DNP  [0402_COILCRAFT]  83.72,104.87 180 top
L7  DNP  [0402_COILCRAFT]  24.21,139.38 180 top
L8  DNP  [0402_COILCRAFT]  83.72,139.38 180 top
L9  DNP  [0402_COILCRAFT]  24.21,173.89 180 top
L10  DNP  [0402_COILCRAFT]  83.72,173.89 180 top
LOGO1  OSHW-LOGOMINI  [OSHW-LOGO-MINI]  116.67,34.14 0 top
LOGO2  SFE_LOGO_NAME_FLAME.1_INCH  [SFE_LOGO_NAME_FLAME_.1]  21.53,28.75 0 bottom
LOGO3  OSHW-LOGOMINI  [OSHW-LOGO-MINI]  57.16,34.14 0 top
LOGO4  OSHW-LOGOMINI  [OSHW-LOGO-MINI]  20.89,12.55 0 bottom
LOGO5  SFE_LOGO_NAME_FLAME.1_INCH  [SFE_LOGO_NAME_FLAME_.1]  56.58,12.03 0 top
LOGO6  SFE_LOGO_NAME_FLAME.1_INCH  [SFE_LOGO_NAME_FLAME_.1]  116.09,12.03 0 top
LOGO7  SFE_LOGO_NAME_FLAME.1_INCH  [SFE_LOGO_NAME_FLAME_.1]  81.04,28.75 0 bottom
LOGO8  OSHW-LOGOMINI  [OSHW-LOGO-MINI]  80.4,12.55 0 bottom
LOGO9  OSHW-LOGOMINI  [OSHW-LOGO-MINI]  57.16,68.65 0 top
LOGO10  SFE_LOGO_NAME_FLAME.1_INCH  [SFE_LOGO_NAME_FLAME_.1]  56.58,46.54 0 top
LOGO11  SFE_LOGO_NAME_FLAME.1_INCH  [SFE_LOGO_NAME_FLAME_.1]  21.53,63.26 0 bottom
LOGO12  OSHW-LOGOMINI  [OSHW-LOGO-MINI]  20.89,47.06 0 bottom
LOGO13  OSHW-LOGOMINI  [OSHW-LOGO-MINI]  116.67,68.65 0 top
LOGO14  SFE_LOGO_NAME_FLAME.1_INCH  [SFE_LOGO_NAME_FLAME_.1]  116.09,46.54 0 top
LOGO15  SFE_LOGO_NAME_FLAME.1_INCH  [SFE_LOGO_NAME_FLAME_.1]  81.04,63.26 0 bottom
LOGO16  OSHW-LOGOMINI  [OSHW-LOGO-MINI]  80.4,47.06 0 bottom
LOGO17  OSHW-LOGOMINI  [OSHW-LOGO-MINI]  57.16,103.15 0 top
LOGO18  SFE_LOGO_NAME_FLAME.1_INCH  [SFE_LOGO_NAME_FLAME_.1]  56.58,81.05 0 top
LOGO19  SFE_LOGO_NAME_FLAME.1_INCH  [SFE_LOGO_NAME_FLAME_.1]  21.53,97.76 0 bottom
LOGO20  OSHW-LOGOMINI  [OSHW-LOGO-MINI]  20.89,81.56 0 bottom
LOGO21  OSHW-LOGOMINI  [OSHW-LOGO-MINI]  116.67,103.15 0 top
LOGO22  SFE_LOGO_NAME_FLAME.1_INCH  [SFE_LOGO_NAME_FLAME_.1]  116.09,81.05 0 top
LOGO23  SFE_LOGO_NAME_FLAME.1_INCH  [SFE_LOGO_NAME_FLAME_.1]  81.04,97.76 0 bottom
LOGO24  OSHW-LOGOMINI  [OSHW-LOGO-MINI]  80.4,81.56 0 bottom
LOGO25  OSHW-LOGOMINI  [OSHW-LOGO-MINI]  57.16,137.66 0 top
LOGO26  SFE_LOGO_NAME_FLAME.1_INCH  [SFE_LOGO_NAME_FLAME_.1]  56.58,115.56 0 top
LOGO27  SFE_LOGO_NAME_FLAME.1_INCH  [SFE_LOGO_NAME_FLAME_.1]  21.53,132.27 0 bottom
LOGO28  OSHW-LOGOMINI  [OSHW-LOGO-MINI]  20.89,116.07 0 bottom
LOGO29  OSHW-LOGOMINI  [OSHW-LOGO-MINI]  116.67,137.66 0 top
LOGO30  SFE_LOGO_NAME_FLAME.1_INCH  [SFE_LOGO_NAME_FLAME_.1]  116.09,115.56 0 top
LOGO31  SFE_LOGO_NAME_FLAME.1_INCH  [SFE_LOGO_NAME_FLAME_.1]  81.04,132.27 0 bottom
LOGO32  OSHW-LOGOMINI  [OSHW-LOGO-MINI]  80.4,116.07 0 bottom
LOGO33  OSHW-LOGOMINI  [OSHW-LOGO-MINI]  57.16,172.17 0 top
LOGO34  SFE_LOGO_NAME_FLAME.1_INCH  [SFE_LOGO_NAME_FLAME_.1]  56.58,150.06 0 top
LOGO35  SFE_LOGO_NAME_FLAME.1_INCH  [SFE_LOGO_NAME_FLAME_.1]  21.53,166.78 0 bottom
LOGO36  OSHW-LOGOMINI  [OSHW-LOGO-MINI]  20.89,150.58 0 bottom
LOGO37  OSHW-LOGOMINI  [OSHW-LOGO-MINI]  116.67,172.17 0 top
LOGO38  SFE_LOGO_NAME_FLAME.1_INCH  [SFE_LOGO_NAME_FLAME_.1]  116.09,150.06 0 top
LOGO39  SFE_LOGO_NAME_FLAME.1_INCH  [SFE_LOGO_NAME_FLAME_.1]  81.04,166.78 0 bottom
LOGO40  OSHW-LOGOMINI  [OSHW-LOGO-MINI]  80.4,150.58 0 bottom
Q1  20V/0.2A/8MHz/1.2Ω/1Vth  [SOT-416FL]  56.36,29.86 90 top
Q2  310mA/60V/1.6Ω  [SOT323]  57.36,19.86 90 top
Q3  310mA/60V/1.6Ω  [SOT323]  51.36,24.86 90 top
Q4  310mA/60V/1.6Ω  [SOT323]  116.87,19.86 90 top
Q5  310mA/60V/1.6Ω  [SOT323]  110.87,24.86 90 top
Q6  20V/0.2A/8MHz/1.2Ω/1Vth  [SOT-416FL]  115.87,29.86 90 top
Q7  310mA/60V/1.6Ω  [SOT323]  57.36,54.37 90 top
Q8  310mA/60V/1.6Ω  [SOT323]  51.36,59.37 90 top
Q9  20V/0.2A/8MHz/1.2Ω/1Vth  [SOT-416FL]  56.36,64.37 90 top
Q10  310mA/60V/1.6Ω  [SOT323]  116.87,54.37 90 top
Q11  310mA/60V/1.6Ω  [SOT323]  110.87,59.37 90 top
Q12  20V/0.2A/8MHz/1.2Ω/1Vth  [SOT-416FL]  115.87,64.37 90 top
Q13  310mA/60V/1.6Ω  [SOT323]  57.36,88.87 90 top
Q14  310mA/60V/1.6Ω  [SOT323]  51.36,93.87 90 top
Q15  20V/0.2A/8MHz/1.2Ω/1Vth  [SOT-416FL]  56.36,98.87 90 top
Q16  310mA/60V/1.6Ω  [SOT323]  116.87,88.87 90 top
Q17  310mA/60V/1.6Ω  [SOT323]  110.87,93.87 90 top
Q18  20V/0.2A/8MHz/1.2Ω/1Vth  [SOT-416FL]  115.87,98.87 90 top
Q19  310mA/60V/1.6Ω  [SOT323]  57.36,123.38 90 top
Q20  310mA/60V/1.6Ω  [SOT323]  51.36,128.38 90 top
Q21  20V/0.2A/8MHz/1.2Ω/1Vth  [SOT-416FL]  56.36,133.38 90 top
Q22  310mA/60V/1.6Ω  [SOT323]  116.87,123.38 90 top
Q23  310mA/60V/1.6Ω  [SOT323]  110.87,128.38 90 top
Q24  20V/0.2A/8MHz/1.2Ω/1Vth  [SOT-416FL]  115.87,133.38 90 top
Q25  310mA/60V/1.6Ω  [SOT323]  57.36,157.89 90 top
Q26  310mA/60V/1.6Ω  [SOT323]  51.36,162.89 90 top
Q27  20V/0.2A/8MHz/1.2Ω/1Vth  [SOT-416FL]  56.36,167.89 90 top
Q28  310mA/60V/1.6Ω  [SOT323]  116.87,157.89 90 top
Q29  310mA/60V/1.6Ω  [SOT323]  110.87,162.89 90 top
Q30  20V/0.2A/8MHz/1.2Ω/1Vth  [SOT-416FL]  115.87,167.89 90 top
R1  100k  [0603]  47.36,27.86 180 top
R2  100k  [0603]  54.36,19.86 270 top
R3  100k  [0603]  41.36,29.86 90 top
R4  1k  [0603]  60.36,19.86 270 top
R5  1k  [0603]  54.36,24.86 270 top
R6  2.2k  [0603]  59.36,29.86 270 top
R7  2.2k  [0603]  54.36,29.86 90 top
R8  0  [0603]  31.96,25.86 180 top
R9  0  [0603]  91.47,25.86 180 top
R10  1k  [0603]  119.87,19.86 270 top
R11  1k  [0603]  113.87,24.86 270 top
R12  2.2k  [0603]  118.87,29.86 270 top
R13  2.2k  [0603]  113.87,29.86 90 top
R14  100k  [0603]  113.87,19.86 270 top
R15  100k  [0603]  100.87,29.86 90 top
R16  100k  [0603]  106.87,27.86 180 top
R17  0  [0603]  31.96,60.37 180 top
R18  1k  [0603]  60.36,54.37 270 top
R19  1k  [0603]  54.36,59.37 270 top
R20  2.2k  [0603]  59.36,64.37 270 top
R21  2.2k  [0603]  54.36,64.37 90 top
R22  100k  [0603]  54.36,54.37 270 top
R23  100k  [0603]  41.36,64.37 90 top
R24  100k  [0603]  47.36,62.37 180 top
R25  0  [0603]  91.47,60.37 180 top
R26  1k  [0603]  119.87,54.37 270 top
R27  1k  [0603]  113.87,59.37 270 top
R28  2.2k  [0603]  118.87,64.37 270 top
R29  2.2k  [0603]  113.87,64.37 90 top
R30  100k  [0603]  113.87,54.37 270 top
R31  100k  [0603]  100.87,64.37 90 top
R32  100k  [0603]  106.87,62.37 180 top
R33  0  [0603]  31.96,94.87 180 top
R34  1k  [0603]  60.36,88.87 270 top
R35  1k  [0603]  54.36,93.87 270 top
R36  2.2k  [0603]  59.36,98.87 270 top
R37  2.2k  [0603]  54.36,98.87 90 top
R38  100k  [0603]  54.36,88.87 270 top
R39  100k  [0603]  41.36,98.87 90 top
R40  100k  [0603]  47.36,96.87 180 top
R41  0  [0603]  91.47,94.87 180 top
R42  1k  [0603]  119.87,88.87 270 top
R43  1k  [0603]  113.87,93.87 270 top
R44  2.2k  [0603]  118.87,98.87 270 top
R45  2.2k  [0603]  113.87,98.87 90 top
R46  100k  [0603]  113.87,88.87 270 top
R47  100k  [0603]  100.87,98.87 90 top
R48  100k  [0603]  106.87,96.87 180 top
R49  0  [0603]  31.96,129.38 180 top
R50  1k  [0603]  60.36,123.38 270 top
R51  1k  [0603]  54.36,128.38 270 top
R52  2.2k  [0603]  59.36,133.38 270 top
R53  2.2k  [0603]  54.36,133.38 90 top
R54  100k  [0603]  54.36,123.38 270 top
R55  100k  [0603]  41.36,133.38 90 top
R56  100k  [0603]  47.36,131.38 180 top
R57  0  [0603]  91.47,129.38 180 top
R58  1k  [0603]  119.87,123.38 270 top
R59  1k  [0603]  113.87,128.38 270 top
R60  2.2k  [0603]  118.87,133.38 270 top
R61  2.2k  [0603]  113.87,133.38 90 top
R62  100k  [0603]  113.87,123.38 270 top
R63  100k  [0603]  100.87,133.38 90 top
R64  100k  [0603]  106.87,131.38 180 top
R65  0  [0603]  31.96,163.89 180 top
R66  1k  [0603]  60.36,157.89 270 top
R67  1k  [0603]  54.36,162.89 270 top
R68  2.2k  [0603]  59.36,167.89 270 top
R69  2.2k  [0603]  54.36,167.89 90 top
R70  100k  [0603]  54.36,157.89 270 top
R71  100k  [0603]  41.36,167.89 90 top
R72  100k  [0603]  47.36,165.89 180 top
R73  0  [0603]  91.47,163.89 180 top
R74  1k  [0603]  119.87,157.89 270 top
R75  1k  [0603]  113.87,162.89 270 top
R76  2.2k  [0603]  118.87,167.89 270 top
R77  2.2k  [0603]  113.87,167.89 90 top
R78  100k  [0603]  113.87,157.89 270 top
R79  100k  [0603]  100.87,167.89 90 top
R80  100k  [0603]  106.87,165.89 180 top
TP1  TEST-POINT3  [PAD.03X.03]  35.57,25.91 90 bottom
TP2  TEST-POINT3  [PAD.03X.03]  36.84,27.18 90 bottom
TP3  TEST-POINT3  [PAD.03X.03]  38.11,25.91 90 bottom
TP4  TEST-POINT3  [PAD.03X.03]  39.38,27.18 90 bottom
TP5  TEST-POINT3  [PAD.03X.03]  39.38,33.53 90 bottom
TP6  TEST-POINT3  [PAD.03X.03]  38.11,32.26 90 bottom
TP7  TEST-POINT3  [PAD.03X.03]  36.84,33.53 90 bottom
TP8  TEST-POINT3  [PAD.03X.03]  35.57,32.26 90 bottom
TP9  TEST-POINT3  [PAD.03X.03]  21.6,9.4 0 bottom
TP10  TEST-POINT3  [PAD.03X.03]  24.14,9.4 0 bottom
TP11  TEST-POINT3  [PAD.03X.03]  11.44,14.48 0 bottom
TP12  TEST-POINT3  [PAD.03X.03]  34.3,33.53 90 bottom
TP13  TEST-POINT3  [PAD.03X.03]  40.65,32.26 0 bottom
TP14  TEST-POINT3  [PAD.03X.03]  33.03,32.26 0 bottom
TP15  TEST-POINT3  [PAD.03X.03]  41.92,33.53 0 bottom
TP16  TEST-POINT3  [PAD.03X.03]  95.08,25.91 90 bottom
TP17  TEST-POINT3  [PAD.03X.03]  96.35,27.18 90 bottom
TP18  TEST-POINT3  [PAD.03X.03]  97.62,25.91 90 bottom
TP19  TEST-POINT3  [PAD.03X.03]  98.89,27.18 90 bottom
TP20  TEST-POINT3  [PAD.03X.03]  98.89,33.53 90 bottom
TP21  TEST-POINT3  [PAD.03X.03]  97.62,32.26 90 bottom
TP22  TEST-POINT3  [PAD.03X.03]  96.35,33.53 90 bottom
TP23  TEST-POINT3  [PAD.03X.03]  95.08,32.26 90 bottom
TP24  TEST-POINT3  [PAD.03X.03]  93.81,33.53 90 bottom
TP25  TEST-POINT3  [PAD.03X.03]  81.11,9.4 0 bottom
TP26  TEST-POINT3  [PAD.03X.03]  83.65,9.4 0 bottom
TP27  TEST-POINT3  [PAD.03X.03]  70.95,14.48 0 bottom
TP28  TEST-POINT3  [PAD.03X.03]  100.16,32.26 0 bottom
TP29  TEST-POINT3  [PAD.03X.03]  92.54,32.26 0 bottom
TP30  TEST-POINT3  [PAD.03X.03]  101.43,33.53 0 bottom
TP31  TEST-POINT3  [PAD.03X.03]  35.57,60.42 90 bottom
TP32  TEST-POINT3  [PAD.03X.03]  36.84,61.69 90 bottom
TP33  TEST-POINT3  [PAD.03X.03]  38.11,60.42 90 bottom
TP34  TEST-POINT3  [PAD.03X.03]  39.38,61.69 90 bottom
TP35  TEST-POINT3  [PAD.03X.03]  39.38,68.04 90 bottom
TP36  TEST-POINT3  [PAD.03X.03]  38.11,66.77 90 bottom
TP37  TEST-POINT3  [PAD.03X.03]  36.84,68.04 90 bottom
TP38  TEST-POINT3  [PAD.03X.03]  35.57,66.77 90 bottom
TP39  TEST-POINT3  [PAD.03X.03]  34.3,68.04 90 bottom
TP40  TEST-POINT3  [PAD.03X.03]  21.6,43.91 0 bottom
TP41  TEST-POINT3  [PAD.03X.03]  24.14,43.91 0 bottom
TP42  TEST-POINT3  [PAD.03X.03]  11.44,48.99 0 bottom
TP43  TEST-POINT3  [PAD.03X.03]  40.65,66.77 0 bottom
TP44  TEST-POINT3  [PAD.03X.03]  33.03,66.77 0 bottom
TP45  TEST-POINT3  [PAD.03X.03]  41.92,68.04 0 bottom
TP46  TEST-POINT3  [PAD.03X.03]  95.08,60.42 90 bottom
TP47  TEST-POINT3  [PAD.03X.03]  96.35,61.69 90 bottom
TP48  TEST-POINT3  [PAD.03X.03]  97.62,60.42 90 bottom
TP49  TEST-POINT3  [PAD.03X.03]  98.89,61.69 90 bottom
TP50  TEST-POINT3  [PAD.03X.03]  98.89,68.04 90 bottom
TP51  TEST-POINT3  [PAD.03X.03]  97.62,66.77 90 bottom
TP52  TEST-POINT3  [PAD.03X.03]  96.35,68.04 90 bottom
TP53  TEST-POINT3  [PAD.03X.03]  95.08,66.77 90 bottom
TP54  TEST-POINT3  [PAD.03X.03]  93.81,68.04 90 bottom
TP55  TEST-POINT3  [PAD.03X.03]  81.11,43.91 0 bottom
TP56  TEST-POINT3  [PAD.03X.03]  83.65,43.91 0 bottom
TP57  TEST-POINT3  [PAD.03X.03]  70.95,48.99 0 bottom
TP58  TEST-POINT3  [PAD.03X.03]  100.16,66.77 0 bottom
TP59  TEST-POINT3  [PAD.03X.03]  92.54,66.77 0 bottom
TP60  TEST-POINT3  [PAD.03X.03]  101.43,68.04 0 bottom
TP61  TEST-POINT3  [PAD.03X.03]  35.57,94.92 90 bottom
TP62  TEST-POINT3  [PAD.03X.03]  36.84,96.19 90 bottom
TP63  TEST-POINT3  [PAD.03X.03]  38.11,94.92 90 bottom
TP64  TEST-POINT3  [PAD.03X.03]  39.38,96.19 90 bottom
TP65  TEST-POINT3  [PAD.03X.03]  39.38,102.54 90 bottom
TP66  TEST-POINT3  [PAD.03X.03]  38.11,101.27 90 bottom
TP67  TEST-POINT3  [PAD.03X.03]  36.84,102.54 90 bottom
TP68  TEST-POINT3  [PAD.03X.03]  35.57,101.27 90 bottom
TP69  TEST-POINT3  [PAD.03X.03]  34.3,102.54 90 bottom
TP70  TEST-POINT3  [PAD.03X.03]  21.6,78.41 0 bottom
TP71  TEST-POINT3  [PAD.03X.03]  24.14,78.41 0 bottom
TP72  TEST-POINT3  [PAD.03X.03]  11.44,83.49 0 bottom
TP73  TEST-POINT3  [PAD.03X.03]  40.65,101.27 0 bottom
TP74  TEST-POINT3  [PAD.03X.03]  33.03,101.27 0 bottom
TP75  TEST-POINT3  [PAD.03X.03]  41.92,102.54 0 bottom
TP76  TEST-POINT3  [PAD.03X.03]  95.08,94.92 90 bottom
TP77  TEST-POINT3  [PAD.03X.03]  96.35,96.19 90 bottom
TP78  TEST-POINT3  [PAD.03X.03]  97.62,94.92 90 bottom
TP79  TEST-POINT3  [PAD.03X.03]  98.89,96.19 90 bottom
TP80  TEST-POINT3  [PAD.03X.03]  98.89,102.54 90 bottom
TP81  TEST-POINT3  [PAD.03X.03]  97.62,101.27 90 bottom
TP82  TEST-POINT3  [PAD.03X.03]  96.35,102.54 90 bottom
TP83  TEST-POINT3  [PAD.03X.03]  95.08,101.27 90 bottom
TP84  TEST-POINT3  [PAD.03X.03]  93.81,102.54 90 bottom
TP85  TEST-POINT3  [PAD.03X.03]  81.11,78.41 0 bottom
TP86  TEST-POINT3  [PAD.03X.03]  83.65,78.41 0 bottom
TP87  TEST-POINT3  [PAD.03X.03]  70.95,83.49 0 bottom
TP88  TEST-POINT3  [PAD.03X.03]  100.16,101.27 0 bottom
TP89  TEST-POINT3  [PAD.03X.03]  92.54,101.27 0 bottom
TP90  TEST-POINT3  [PAD.03X.03]  101.43,102.54 0 bottom
TP91  TEST-POINT3  [PAD.03X.03]  35.57,129.43 90 bottom
TP92  TEST-POINT3  [PAD.03X.03]  36.84,130.7 90 bottom
TP93  TEST-POINT3  [PAD.03X.03]  38.11,129.43 90 bottom
TP94  TEST-POINT3  [PAD.03X.03]  39.38,130.7 90 bottom
TP95  TEST-POINT3  [PAD.03X.03]  39.38,137.05 90 bottom
TP96  TEST-POINT3  [PAD.03X.03]  38.11,135.78 90 bottom
TP97  TEST-POINT3  [PAD.03X.03]  36.84,137.05 90 bottom
TP98  TEST-POINT3  [PAD.03X.03]  35.57,135.78 90 bottom
TP99  TEST-POINT3  [PAD.03X.03]  34.3,137.05 90 bottom
TP100  TEST-POINT3  [PAD.03X.03]  21.6,112.92 0 bottom
TP101  TEST-POINT3  [PAD.03X.03]  24.14,112.92 0 bottom
TP102  TEST-POINT3  [PAD.03X.03]  11.44,118 0 bottom
TP103  TEST-POINT3  [PAD.03X.03]  40.65,135.78 0 bottom
TP104  TEST-POINT3  [PAD.03X.03]  33.03,135.78 0 bottom
TP105  TEST-POINT3  [PAD.03X.03]  41.92,137.05 0 bottom
TP106  TEST-POINT3  [PAD.03X.03]  95.08,129.43 90 bottom
TP107  TEST-POINT3  [PAD.03X.03]  96.35,130.7 90 bottom
TP108  TEST-POINT3  [PAD.03X.03]  97.62,129.43 90 bottom
TP109  TEST-POINT3  [PAD.03X.03]  98.89,130.7 90 bottom
TP110  TEST-POINT3  [PAD.03X.03]  98.89,137.05 90 bottom
TP111  TEST-POINT3  [PAD.03X.03]  97.62,135.78 90 bottom
TP112  TEST-POINT3  [PAD.03X.03]  96.35,137.05 90 bottom
TP113  TEST-POINT3  [PAD.03X.03]  95.08,135.78 90 bottom
TP114  TEST-POINT3  [PAD.03X.03]  93.81,137.05 90 bottom
TP115  TEST-POINT3  [PAD.03X.03]  81.11,112.92 0 bottom
TP116  TEST-POINT3  [PAD.03X.03]  83.65,112.92 0 bottom
TP117  TEST-POINT3  [PAD.03X.03]  70.95,118 0 bottom
TP118  TEST-POINT3  [PAD.03X.03]  100.16,135.78 0 bottom
TP119  TEST-POINT3  [PAD.03X.03]  92.54,135.78 0 bottom
TP120  TEST-POINT3  [PAD.03X.03]  101.43,137.05 0 bottom
TP121  TEST-POINT3  [PAD.03X.03]  35.57,163.94 90 bottom
TP122  TEST-POINT3  [PAD.03X.03]  36.84,165.21 90 bottom
TP123  TEST-POINT3  [PAD.03X.03]  38.11,163.94 90 bottom
TP124  TEST-POINT3  [PAD.03X.03]  39.38,165.21 90 bottom
TP125  TEST-POINT3  [PAD.03X.03]  39.38,171.56 90 bottom
TP126  TEST-POINT3  [PAD.03X.03]  38.11,170.29 90 bottom
TP127  TEST-POINT3  [PAD.03X.03]  36.84,171.56 90 bottom
TP128  TEST-POINT3  [PAD.03X.03]  35.57,170.29 90 bottom
TP129  TEST-POINT3  [PAD.03X.03]  34.3,171.56 90 bottom
TP130  TEST-POINT3  [PAD.03X.03]  21.6,147.43 0 bottom
TP131  TEST-POINT3  [PAD.03X.03]  24.14,147.43 0 bottom
TP132  TEST-POINT3  [PAD.03X.03]  11.44,152.51 0 bottom
TP133  TEST-POINT3  [PAD.03X.03]  40.65,170.29 0 bottom
TP134  TEST-POINT3  [PAD.03X.03]  33.03,170.29 0 bottom
TP135  TEST-POINT3  [PAD.03X.03]  41.92,171.56 0 bottom
TP136  TEST-POINT3  [PAD.03X.03]  95.08,163.94 90 bottom
TP137  TEST-POINT3  [PAD.03X.03]  96.35,165.21 90 bottom
TP138  TEST-POINT3  [PAD.03X.03]  97.62,163.94 90 bottom
TP139  TEST-POINT3  [PAD.03X.03]  98.89,165.21 90 bottom
TP140  TEST-POINT3  [PAD.03X.03]  98.89,171.56 90 bottom
TP141  TEST-POINT3  [PAD.03X.03]  97.62,170.29 90 bottom
TP142  TEST-POINT3  [PAD.03X.03]  96.35,171.56 90 bottom
TP143  TEST-POINT3  [PAD.03X.03]  95.08,170.29 90 bottom
TP144  TEST-POINT3  [PAD.03X.03]  93.81,171.56 90 bottom
TP145  TEST-POINT3  [PAD.03X.03]  81.11,147.43 0 bottom
TP146  TEST-POINT3  [PAD.03X.03]  83.65,147.43 0 bottom
TP147  TEST-POINT3  [PAD.03X.03]  70.95,152.51 0 bottom
TP148  TEST-POINT3  [PAD.03X.03]  100.16,170.29 0 bottom
TP149  TEST-POINT3  [PAD.03X.03]  92.54,170.29 0 bottom
TP150  TEST-POINT3  [PAD.03X.03]  101.43,171.56 0 bottom
U1  SARA-R510M8S  [SARA-LGA]  21.36,20.86 270 top
U2  74HC1G04  [SOT353]  57.36,24.86 90 top
U3  AP2112K-3.3  [SOT23-5]  47.86,30.86 270 top
U4  SARA-R510M8S  [SARA-LGA]  80.87,20.86 270 top
U5  74HC1G04  [SOT353]  116.87,24.86 90 top
U6  AP2112K-3.3  [SOT23-5]  107.37,30.86 270 top
U7  SARA-R510M8S  [SARA-LGA]  21.36,55.37 270 top
U8  74HC1G04  [SOT353]  57.36,59.37 90 top
U9  AP2112K-3.3  [SOT23-5]  47.86,65.37 270 top
U10  SARA-R510M8S  [SARA-LGA]  80.87,55.37 270 top
U11  74HC1G04  [SOT353]  116.87,59.37 90 top
U12  AP2112K-3.3  [SOT23-5]  107.37,65.37 270 top
U13  SARA-R510M8S  [SARA-LGA]  21.36,89.87 270 top
U14  74HC1G04  [SOT353]  57.36,93.87 90 top
U15  AP2112K-3.3  [SOT23-5]  47.86,99.87 270 top
U16  SARA-R510M8S  [SARA-LGA]  80.87,89.87 270 top
U17  74HC1G04  [SOT353]  116.87,93.87 90 top
U18  AP2112K-3.3  [SOT23-5]  107.37,99.87 270 top
U19  SARA-R510M8S  [SARA-LGA]  21.36,124.38 270 top
U20  74HC1G04  [SOT353]  57.36,128.38 90 top
U21  AP2112K-3.3  [SOT23-5]  47.86,134.38 270 top
U22  SARA-R510M8S  [SARA-LGA]  80.87,124.38 270 top
U23  74HC1G04  [SOT353]  116.87,128.38 90 top
U24  AP2112K-3.3  [SOT23-5]  107.37,134.38 270 top
U25  SARA-R510M8S  [SARA-LGA]  21.36,158.89 270 top
U26  74HC1G04  [SOT353]  57.36,162.89 90 top
U27  AP2112K-3.3  [SOT23-5]  47.86,168.89 270 top
U28  SARA-R510M8S  [SARA-LGA]  80.87,158.89 270 top
U29  74HC1G04  [SOT353]  116.87,162.89 90 top
U30  AP2112K-3.3  [SOT23-5]  107.37,168.89 270 top
U$1  [RTK_FACET0]  20.89,27.07 0 bottom
U$2  [CELLULAR1]  57.16,9.06 0 top
U$3  [CELLULAR1]  20.89,25.83 0 bottom
U$4  [#VOUT#0]  45.76,35.16 270 bottom
U$5  [#3#3V#0]  48.36,35.66 270 bottom
U$6  [#VCCIO#0]  50.86,34.96 270 bottom
U$7  [#LTE_RXI#0]  53.36,34.46 270 bottom
U$8  [#LTE_TXO#0]  55.86,34.06 270 bottom
U$9  [#GND#0]  58.36,35.86 270 bottom
U$10  [LTE_ANTENNA0]  25.22,39.5 0 top
U$11  [CELLULAR1]  116.67,9.06 0 top
U$12  [RTK_FACET0]  116.67,10.44 0 top
U$13  [NANO0]  95.07,10.48 270 bottom
U$14  [RTK_FACET0]  57.16,10.44 0 top
U$15  [RTK5#SVG0]  20.89,20.32 0 bottom
U$16  [SIM0]  96.5,10.48 270 bottom
U$17  [RTK_FACET0]  80.4,27.07 0 bottom
U$18  [CELLULAR1]  80.4,25.83 0 bottom
U$19  [#VOUT#0]  105.27,35.16 270 bottom
U$20  [#3#3V#0]  107.87,35.66 270 bottom
U$21  [#VCCIO#0]  110.37,34.96 270 bottom
U$22  [#LTE_RXI#0]  112.87,34.46 270 bottom
U$23  [#LTE_TXO#0]  115.37,34.06 270 bottom
U$24  [#GND#0]  117.87,35.86 270 bottom
U$25  [RTK5#SVG0]  80.4,20.32 0 bottom
U$26  [LTE_ANTENNA0]  84.72,39.5 0 top
U$27  [CELLULAR1]  57.16,43.57 0 top
U$28  [RTK_FACET0]  57.16,44.95 0 top
U$29  [NANO0]  35.56,44.99 270 bottom
U$30  [SIM0]  36.99,44.99 270 bottom
U$31  [RTK_FACET0]  20.89,61.58 0 bottom
U$32  [CELLULAR1]  20.89,60.34 0 bottom
U$33  [#VOUT#0]  45.76,69.67 270 bottom
U$34  [#3#3V#0]  48.36,70.17 270 bottom
U$35  [#VCCIO#0]  50.86,69.47 270 bottom
U$36  [#LTE_RXI#0]  53.36,68.97 270 bottom
U$37  [#LTE_TXO#0]  55.86,68.57 270 bottom
U$38  [#GND#0]  58.36,70.37 270 bottom
U$39  [RTK5#SVG0]  20.89,54.83 0 bottom
U$40  [LTE_ANTENNA0]  25.22,74.01 0 top
U$41  [CELLULAR1]  116.67,43.57 0 top
U$42  [RTK_FACET0]  116.67,44.95 0 top
U$43  [NANO0]  95.07,44.99 270 bottom
U$44  [SIM0]  96.5,44.99 270 bottom
U$45  [RTK_FACET0]  80.4,61.58 0 bottom
U$46  [CELLULAR1]  80.4,60.34 0 bottom
U$47  [#VOUT#0]  105.27,69.67 270 bottom
U$48  [#3#3V#0]  107.87,70.17 270 bottom
U$49  [#VCCIO#0]  110.37,69.47 270 bottom
U$50  [#LTE_RXI#0]  112.87,68.97 270 bottom
U$51  [#LTE_TXO#0]  115.37,68.57 270 bottom
U$52  [#GND#0]  117.87,70.37 270 bottom
U$53  [RTK5#SVG0]  80.4,54.83 0 bottom
U$54  [LTE_ANTENNA0]  84.72,74.01 0 top
U$55  [CELLULAR1]  57.16,78.08 0 top
U$56  [RTK_FACET0]  57.16,79.45 0 top
U$57  [NANO0]  35.56,79.49 270 bottom
U$58  [SIM0]  36.99,79.49 270 bottom
U$59  [RTK_FACET0]  20.89,96.09 0 bottom
U$60  [CELLULAR1]  20.89,94.84 0 bottom
U$61  [#VOUT#0]  45.76,104.17 270 bottom
U$62  [#3#3V#0]  48.36,104.67 270 bottom
U$63  [#VCCIO#0]  50.86,103.97 270 bottom
U$64  [#LTE_RXI#0]  53.36,103.47 270 bottom
U$65  [#LTE_TXO#0]  55.86,103.07 270 bottom
U$66  [#GND#0]  58.36,104.87 270 bottom
U$67  [RTK5#SVG0]  20.89,89.34 0 bottom
U$68  [LTE_ANTENNA0]  25.22,108.51 0 top
U$69  [CELLULAR1]  116.67,78.08 0 top
U$70  [RTK_FACET0]  116.67,79.45 0 top
U$71  [NANO0]  95.07,79.49 270 bottom
U$72  [SIM0]  96.5,79.49 270 bottom
U$73  [RTK_FACET0]  80.4,96.09 0 bottom
U$74  [CELLULAR1]  80.4,94.84 0 bottom
U$75  [#VOUT#0]  105.27,104.17 270 bottom
U$76  [#3#3V#0]  107.87,104.67 270 bottom
U$77  [#VCCIO#0]  110.37,103.97 270 bottom
U$78  [#LTE_RXI#0]  112.87,103.47 270 bottom
U$79  [#LTE_TXO#0]  115.37,103.07 270 bottom
U$80  [#GND#0]  117.87,104.87 270 bottom
U$81  [RTK5#SVG0]  80.4,89.34 0 bottom
U$82  [LTE_ANTENNA0]  84.72,108.51 0 top
U$83  [CELLULAR1]  57.16,112.59 0 top
U$84  [RTK_FACET0]  57.16,113.96 0 top
U$85  [NANO0]  35.56,114 270 bottom
U$86  [SIM0]  36.99,114 270 bottom
U$87  [RTK_FACET0]  20.89,130.6 0 bottom
U$88  [CELLULAR1]  20.89,129.35 0 bottom
U$89  [#VOUT#0]  45.76,138.68 270 bottom
U$90  [#3#3V#0]  48.36,139.18 270 bottom
U$91  [#VCCIO#0]  50.86,138.48 270 bottom
U$92  [#LTE_RXI#0]  53.36,137.98 270 bottom
U$93  [#LTE_TXO#0]  55.86,137.58 270 bottom
U$94  [#GND#0]  58.36,139.38 270 bottom
U$95  [RTK5#SVG0]  20.89,123.84 0 bottom
U$96  [LTE_ANTENNA0]  25.22,143.02 0 top
U$97  [CELLULAR1]  116.67,112.59 0 top
U$98  [RTK_FACET0]  116.67,113.96 0 top
U$99  [NANO0]  95.07,114 270 bottom
U$100  [SIM0]  96.5,114 270 bottom
U$101  [RTK_FACET0]  80.4,130.6 0 bottom
U$102  [CELLULAR1]  80.4,129.35 0 bottom
U$103  [#VOUT#0]  105.27,138.68 270 bottom
U$104  [#3#3V#0]  107.87,139.18 270 bottom
U$105  [#VCCIO#0]  110.37,138.48 270 bottom
U$106  [#LTE_RXI#0]  112.87,137.98 270 bottom
U$107  [#LTE_TXO#0]  115.37,137.58 270 bottom
U$108  [#GND#0]  117.87,139.38 270 bottom
U$109  [RTK5#SVG0]  80.4,123.84 0 bottom
U$110  [LTE_ANTENNA0]  84.72,143.02 0 top
U$111  [CELLULAR1]  57.16,147.1 0 top
U$112  [RTK_FACET0]  57.16,148.47 0 top
U$113  [NANO0]  35.56,148.51 270 bottom
U$114  [SIM0]  36.99,148.51 270 bottom
U$115  [RTK_FACET0]  20.89,165.11 0 bottom
U$116  [CELLULAR1]  20.89,163.86 0 bottom
U$117  [#VOUT#0]  45.76,173.19 270 bottom
U$118  [#3#3V#0]  48.36,173.69 270 bottom
U$119  [#VCCIO#0]  50.86,172.99 270 bottom
U$120  [#LTE_RXI#0]  53.36,172.49 270 bottom
U$121  [#LTE_TXO#0]  55.86,172.09 270 bottom
U$122  [#GND#0]  58.36,173.89 270 bottom
U$123  [RTK5#SVG0]  20.89,158.35 0 bottom
U$124  [LTE_ANTENNA0]  25.22,177.53 0 top
U$125  [CELLULAR1]  116.67,147.1 0 top
U$126  [RTK_FACET0]  116.67,148.47 0 top
U$127  [NANO0]  95.07,148.51 270 bottom
U$128  [SIM0]  96.5,148.51 270 bottom
U$129  [RTK_FACET0]  80.4,165.11 0 bottom
U$130  [NANO0]  35.56,10.48 270 bottom
U$131  [SIM0]  36.99,10.48 270 bottom
U$132  [CELLULAR1]  80.4,163.86 0 bottom
U$133  [#VOUT#0]  105.27,173.19 270 bottom
U$134  [#3#3V#0]  107.87,173.69 270 bottom
U$135  [#VCCIO#0]  110.37,172.99 270 bottom
U$136  [#LTE_RXI#0]  112.87,172.49 270 bottom
U$137  [#LTE_TXO#0]  115.37,172.09 270 bottom
U$138  [#GND#0]  117.87,173.89 270 bottom
U$139  [RTK5#SVG0]  80.4,158.35 0 bottom
U$140  [LTE_ANTENNA0]  84.72,177.53 0 top

## Library data of the parts
C1 C3 C17 C30 C32 C35 C48 C50 C53 C66 C68 C71 C84 C86 C89 C102 C104 C107 C120 C122 C125 C138 C140 C143 C156 C158 C161 C174 C176 C179 = SparkFun-Capacitors; PROD_ID: CAP-13930
C2 C4-C6 C18 C19 C27 C31 C33 C36 C37 C45 C49 C51 C54 C55 C63 C67 C69 C72 C73 C81 C85 C87 C90 C91 C99 C103 C105 C108 C109 C117 C121 C123 C126 C127 C135 C139 C141 C144 C145 C153 C157 C159 C162 C163 C171 C175 C177 C180 = SparkFun-Capacitors; PROD_ID: CAP-08604
C7-C10 C23-C26 C41-C44 C59-C62 C77-C80 C95-C98 C113-C116 C131-C134 C149-C152 C167-C170 = SparkFun-Capacitors; PROD_ID: CAP-08913
C11 C20 C38 C56 C74 C92 C110 C128 C146 C164 = SparkFun-Capacitors; PROD_ID: CAP-14092
C12 C21 C39 C57 C75 C93 C111 C129 C147 C165 = SparkFun-Capacitors; PROD_ID: CAP-11015
C13 C28 C46 C64 C82 C100 C118 C136 C154 C172 = New_Parts; DIGIKEY_PART: 490-5936-1-ND; MANUFACTURER: Murata; MANU_PART: GRM1555C1H330JA; PROD_ID: CAP-15358
C14 C16 C29 C34 C47 C52 C65 C70 C83 C88 C101 C106 C119 C124 C137 C142 C155 C160 C173 C178 = SparkFun-Capacitors; PROD_ID: CAP-00810
C15 C22 C40 C58 C76 C94 C112 C130 C148 C166 = SparkFun-Capacitors; PROD_ID: CAP-07881
D1 D4 D6 D8 D10 D12 D14 D16 D18 D20 = New_Parts; DIGIKEY_PART: PESD0402-140CT-ND; MOUSE_PART: 650-PESD0402-140; PROD_ID: DIO-15359
D2 D3 D5 D7 D9 D11 D13 D15 D17 D19 = ublox; PROD_ID: DIO-14095
E$1-E$4 FID1-FID40 LOGO1-LOGO40 = SparkFun-Aesthetics
E$5 E$6 = SparkFun-Retired
IC1-IC10 = New_Parts; ARROW_PART_NUMBER: SN74AVC4T774PW; ARROW_PRICE-STOCK: https://www.arrow.com/en/products/sn74avc4t774pw/texas-instruments; DESCRIPTION: Texas Instruments,SN74AVC4T774PW,IC, Texas Instruments SN74AVC4T774PW, Dual, Bus Transceiver, 4-Bit Non-Inverting 3-State, 1.2 3.6 V, 16-Pin TSSOP; MANUFACTURER_NAME: Texas Instruments; MANUFACTURER_PART_NUMBER: SN74AVC4T774PW; MOUSER_PART_NUMBER: 595-SN74AVC4T774PW; MOUSER_PRICE-STOCK: https://www.mouser.co.uk/ProductDetail/Texas-Instruments/SN74AVC4T774PW?qs=WxL8HmPi5r44hV1AE7gRvg%3D%3D; PROD_ID: IC-15360
J1 J8 J12 J16 J20 J24 J28 J32 J36 J40 = RTK Facet; PROD_ID: CONN-15766
J2 J6 J10 J14 J18 J22 J26 J30 J34 J38 = SparkFun-Connectors; PROD_ID: CONN-09193; SF_ID: WRL-09144
J3 J5 J9 J13 J17 J21 J25 J29 J33 J37 = SparkFun-Connectors; PROD_ID: CONN-08437
J4 J7 J11 J15 J19 J23 J27 J31 J35 J39 = SparkFun-Connectors; PROD_ID: CONN-16272
L1-L10 = New_Parts
Q1 Q6 Q9 Q12 Q15 Q18 Q21 Q24 Q27 Q30 = SparkFun-DiscreteSemi; PROD_ID: TRANS-14399
Q2-Q5 Q7 Q8 Q10 Q11 Q13 Q14 Q16 Q17 Q19 Q20 Q22 Q23 Q25 Q26 Q28 Q29 = SparkFun-DiscreteSemi; PROD_ID: TRANS-11151
R1-R3 R14-R16 R22-R24 R30-R32 R38-R40 R46-R48 R54-R56 R62-R64 R70-R72 R78-R80 = SparkFun-Resistors; PROD_ID: RES-07828
R4 R5 R10 R11 R18 R19 R26 R27 R34 R35 R42 R43 R50 R51 R58 R59 R66 R67 R74 R75 = SparkFun-Resistors; PROD_ID: RES-07856
R6 R7 R12 R13 R20 R21 R28 R29 R36 R37 R44 R45 R52 R53 R60 R61 R68 R69 R76 R77 = SparkFun-Resistors; PROD_ID: RES-08272
R8 R9 R17 R25 R33 R41 R49 R57 R65 R73 = SparkFun-Resistors; PROD_ID: RES-08609
TP1-TP150 = SparkFun-Connectors
U1 U4 U7 U10 U13 U16 U19 U22 U25 U28 = SARA_R5; PROD_ID: IC-15573
U2 U5 U8 U11 U14 U17 U20 U23 U26 U29 = SparkFun-IC-Logic; PROD_ID: COMP-08268
U3 U6 U9 U12 U15 U18 U21 U24 U27 U30 = SparkFun-IC-Power; PROD_ID: VREG-12457
U$1-U$140 = output